# Altium PCB imx6_base_board_lcd7_r1.PcbDoc (part 1 of 6)
Units mil, origin at the board's own origin, x right, y up, seen from the top; angles counter-clockwise.
Board outline 7480.32 x 5118.11 mil, 4 copper layers (Top Layer, Internal Plane 1, Internal Plane 2, Bottom Layer), stack 30.635 mil thick; 518 components, 398 nets, 1886 pads, 1407 vias.
Unrouted connection lines stored in the file: 12.
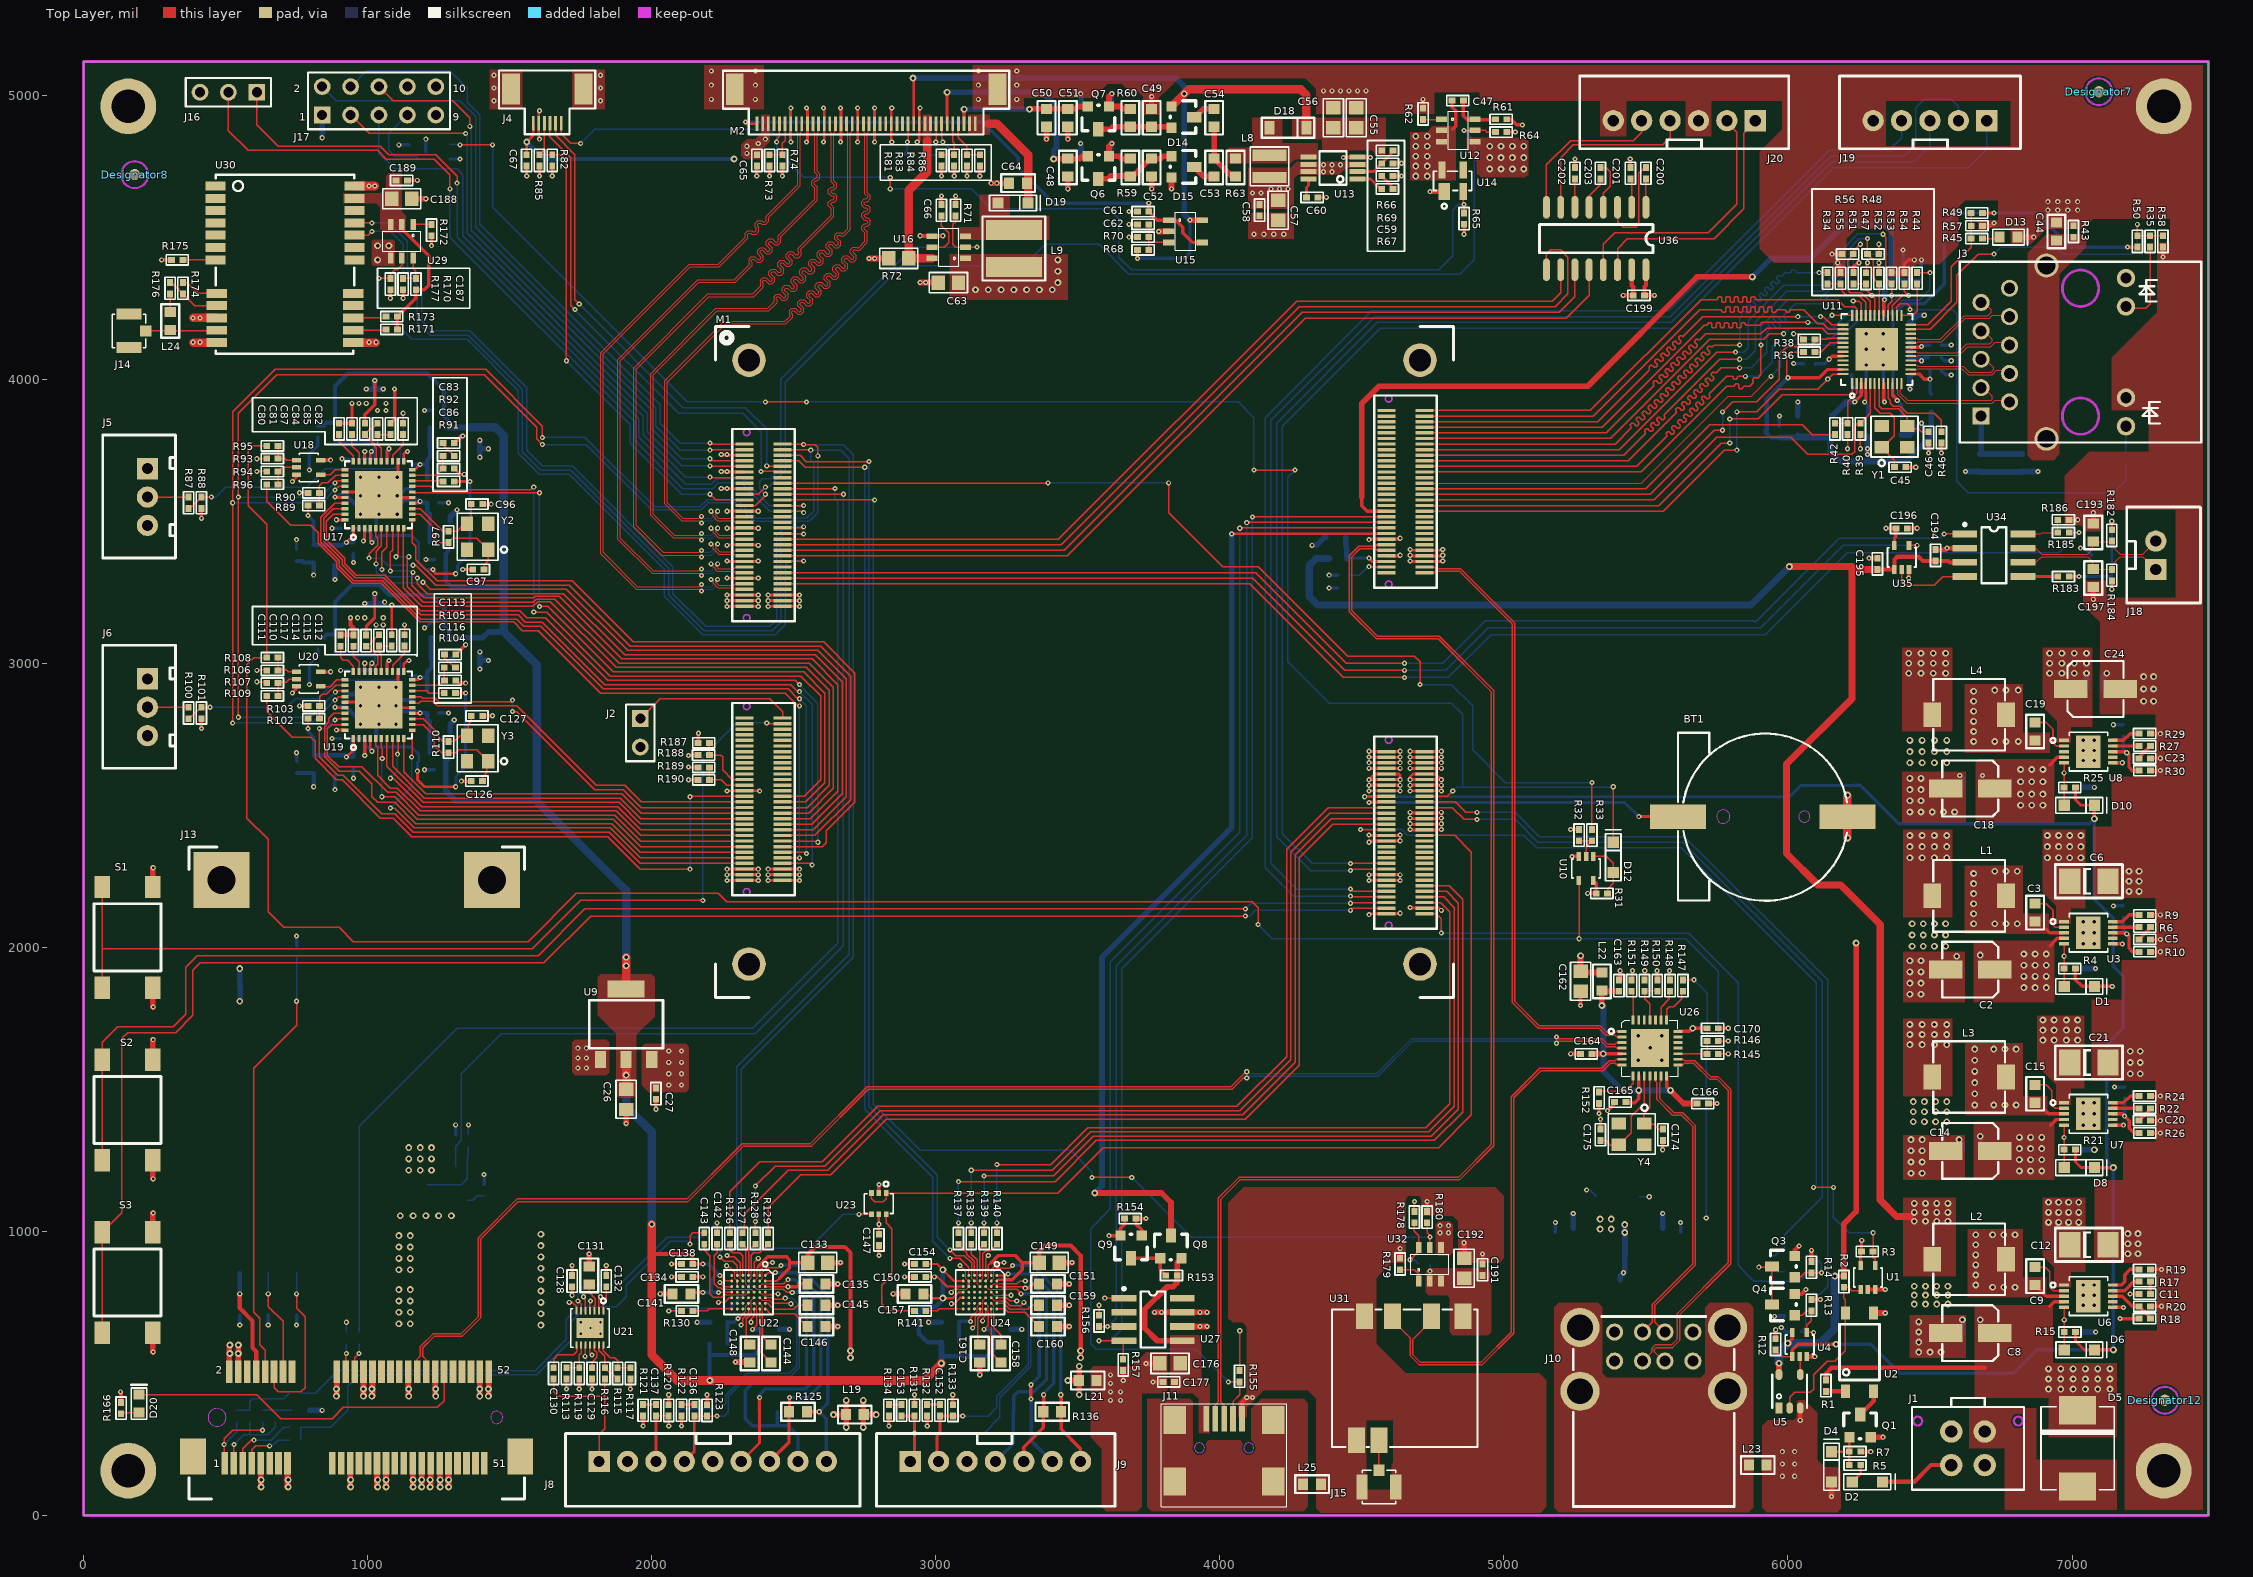
[diagram p0: Top Layer view]
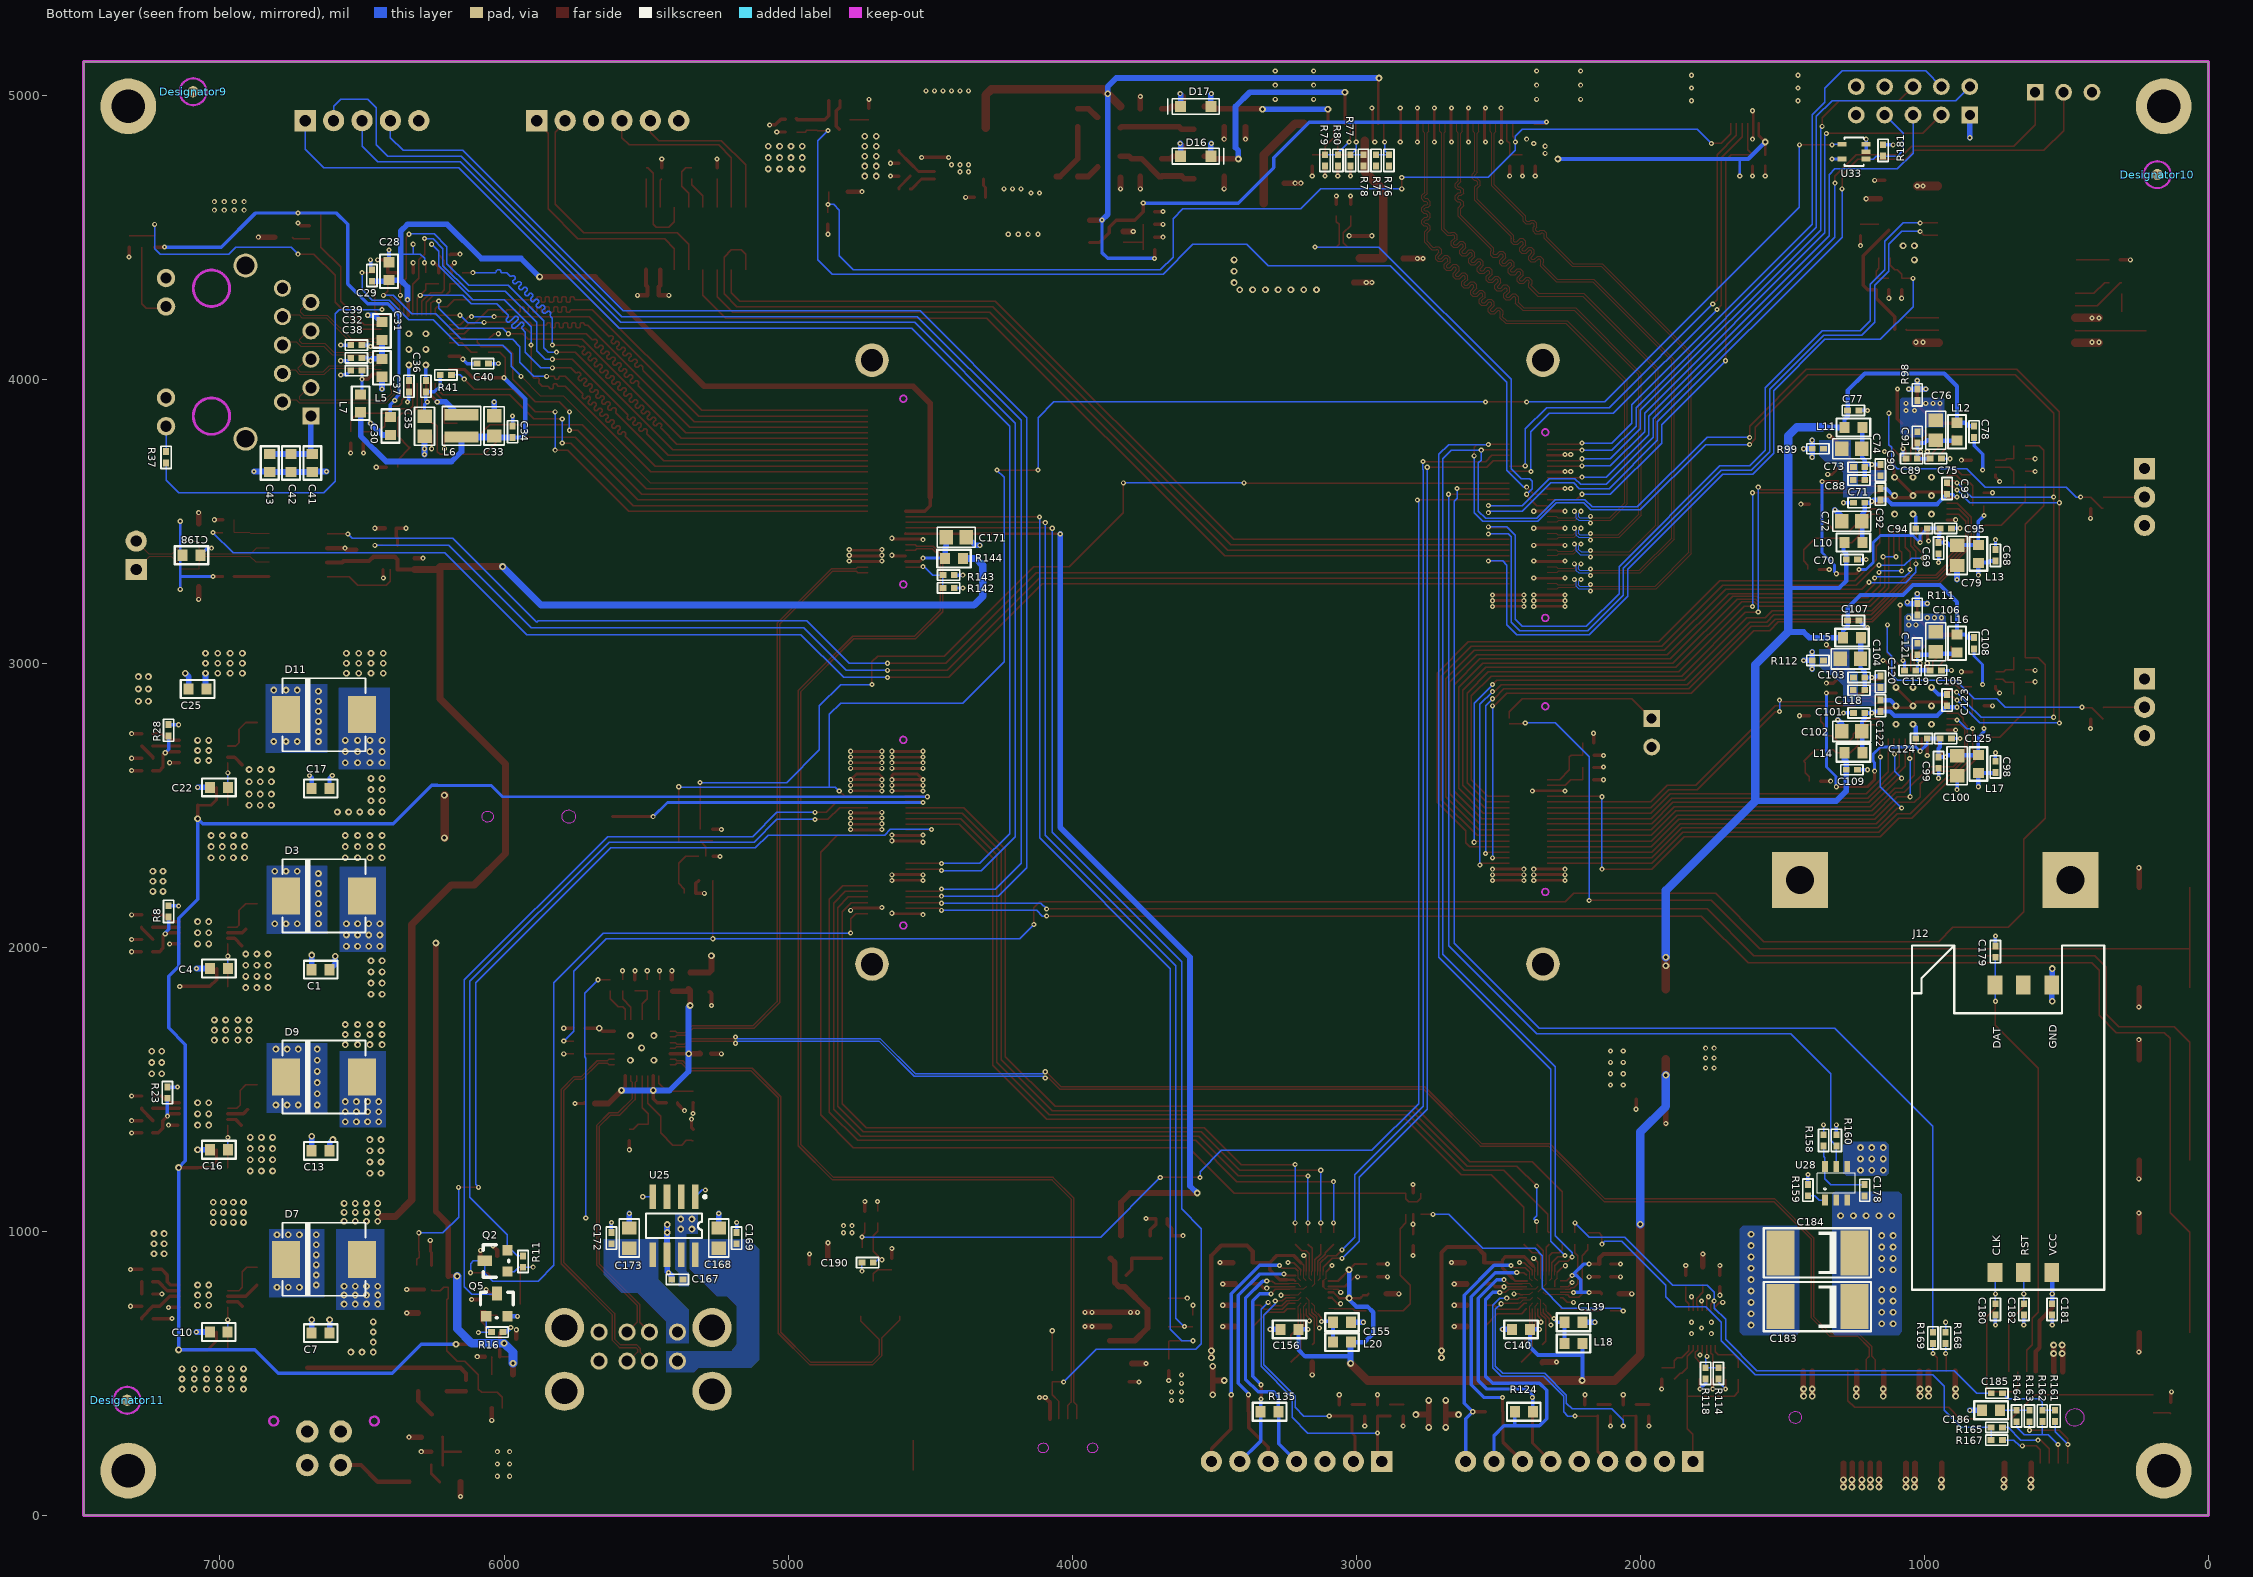
[diagram p1: Bottom Layer view, seen from below]
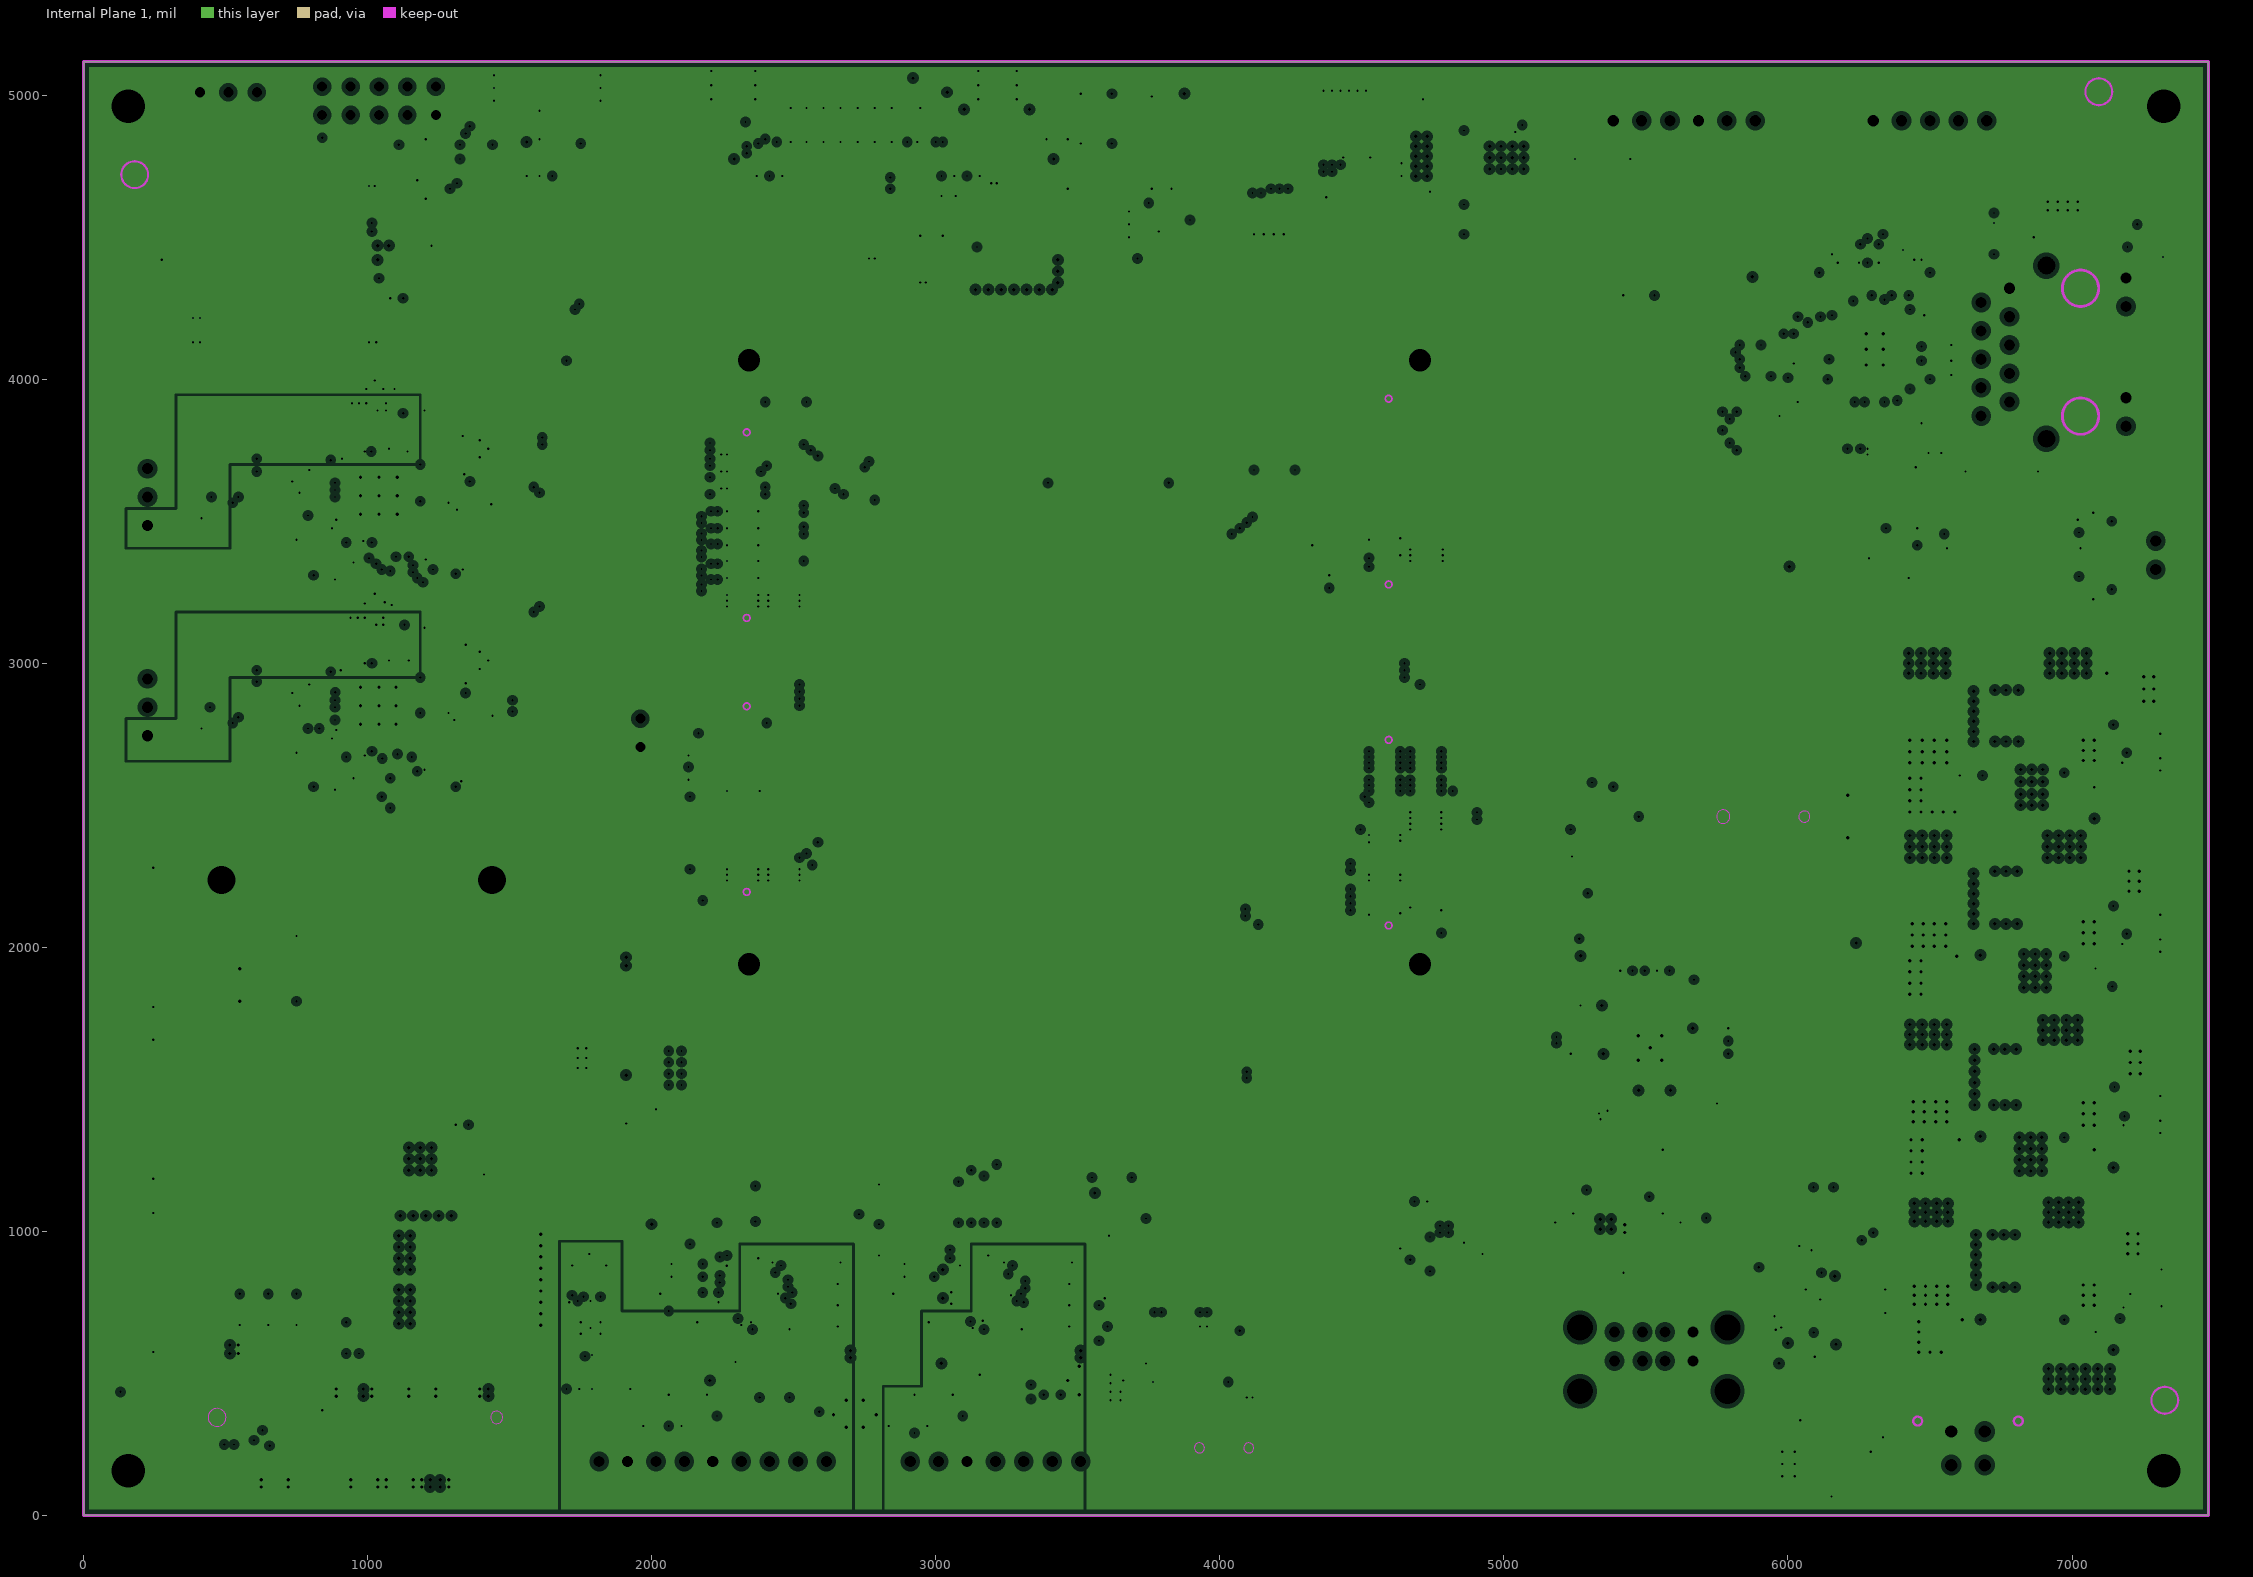
[diagram p2: Internal Plane 1, clearances drawn from the general rule]
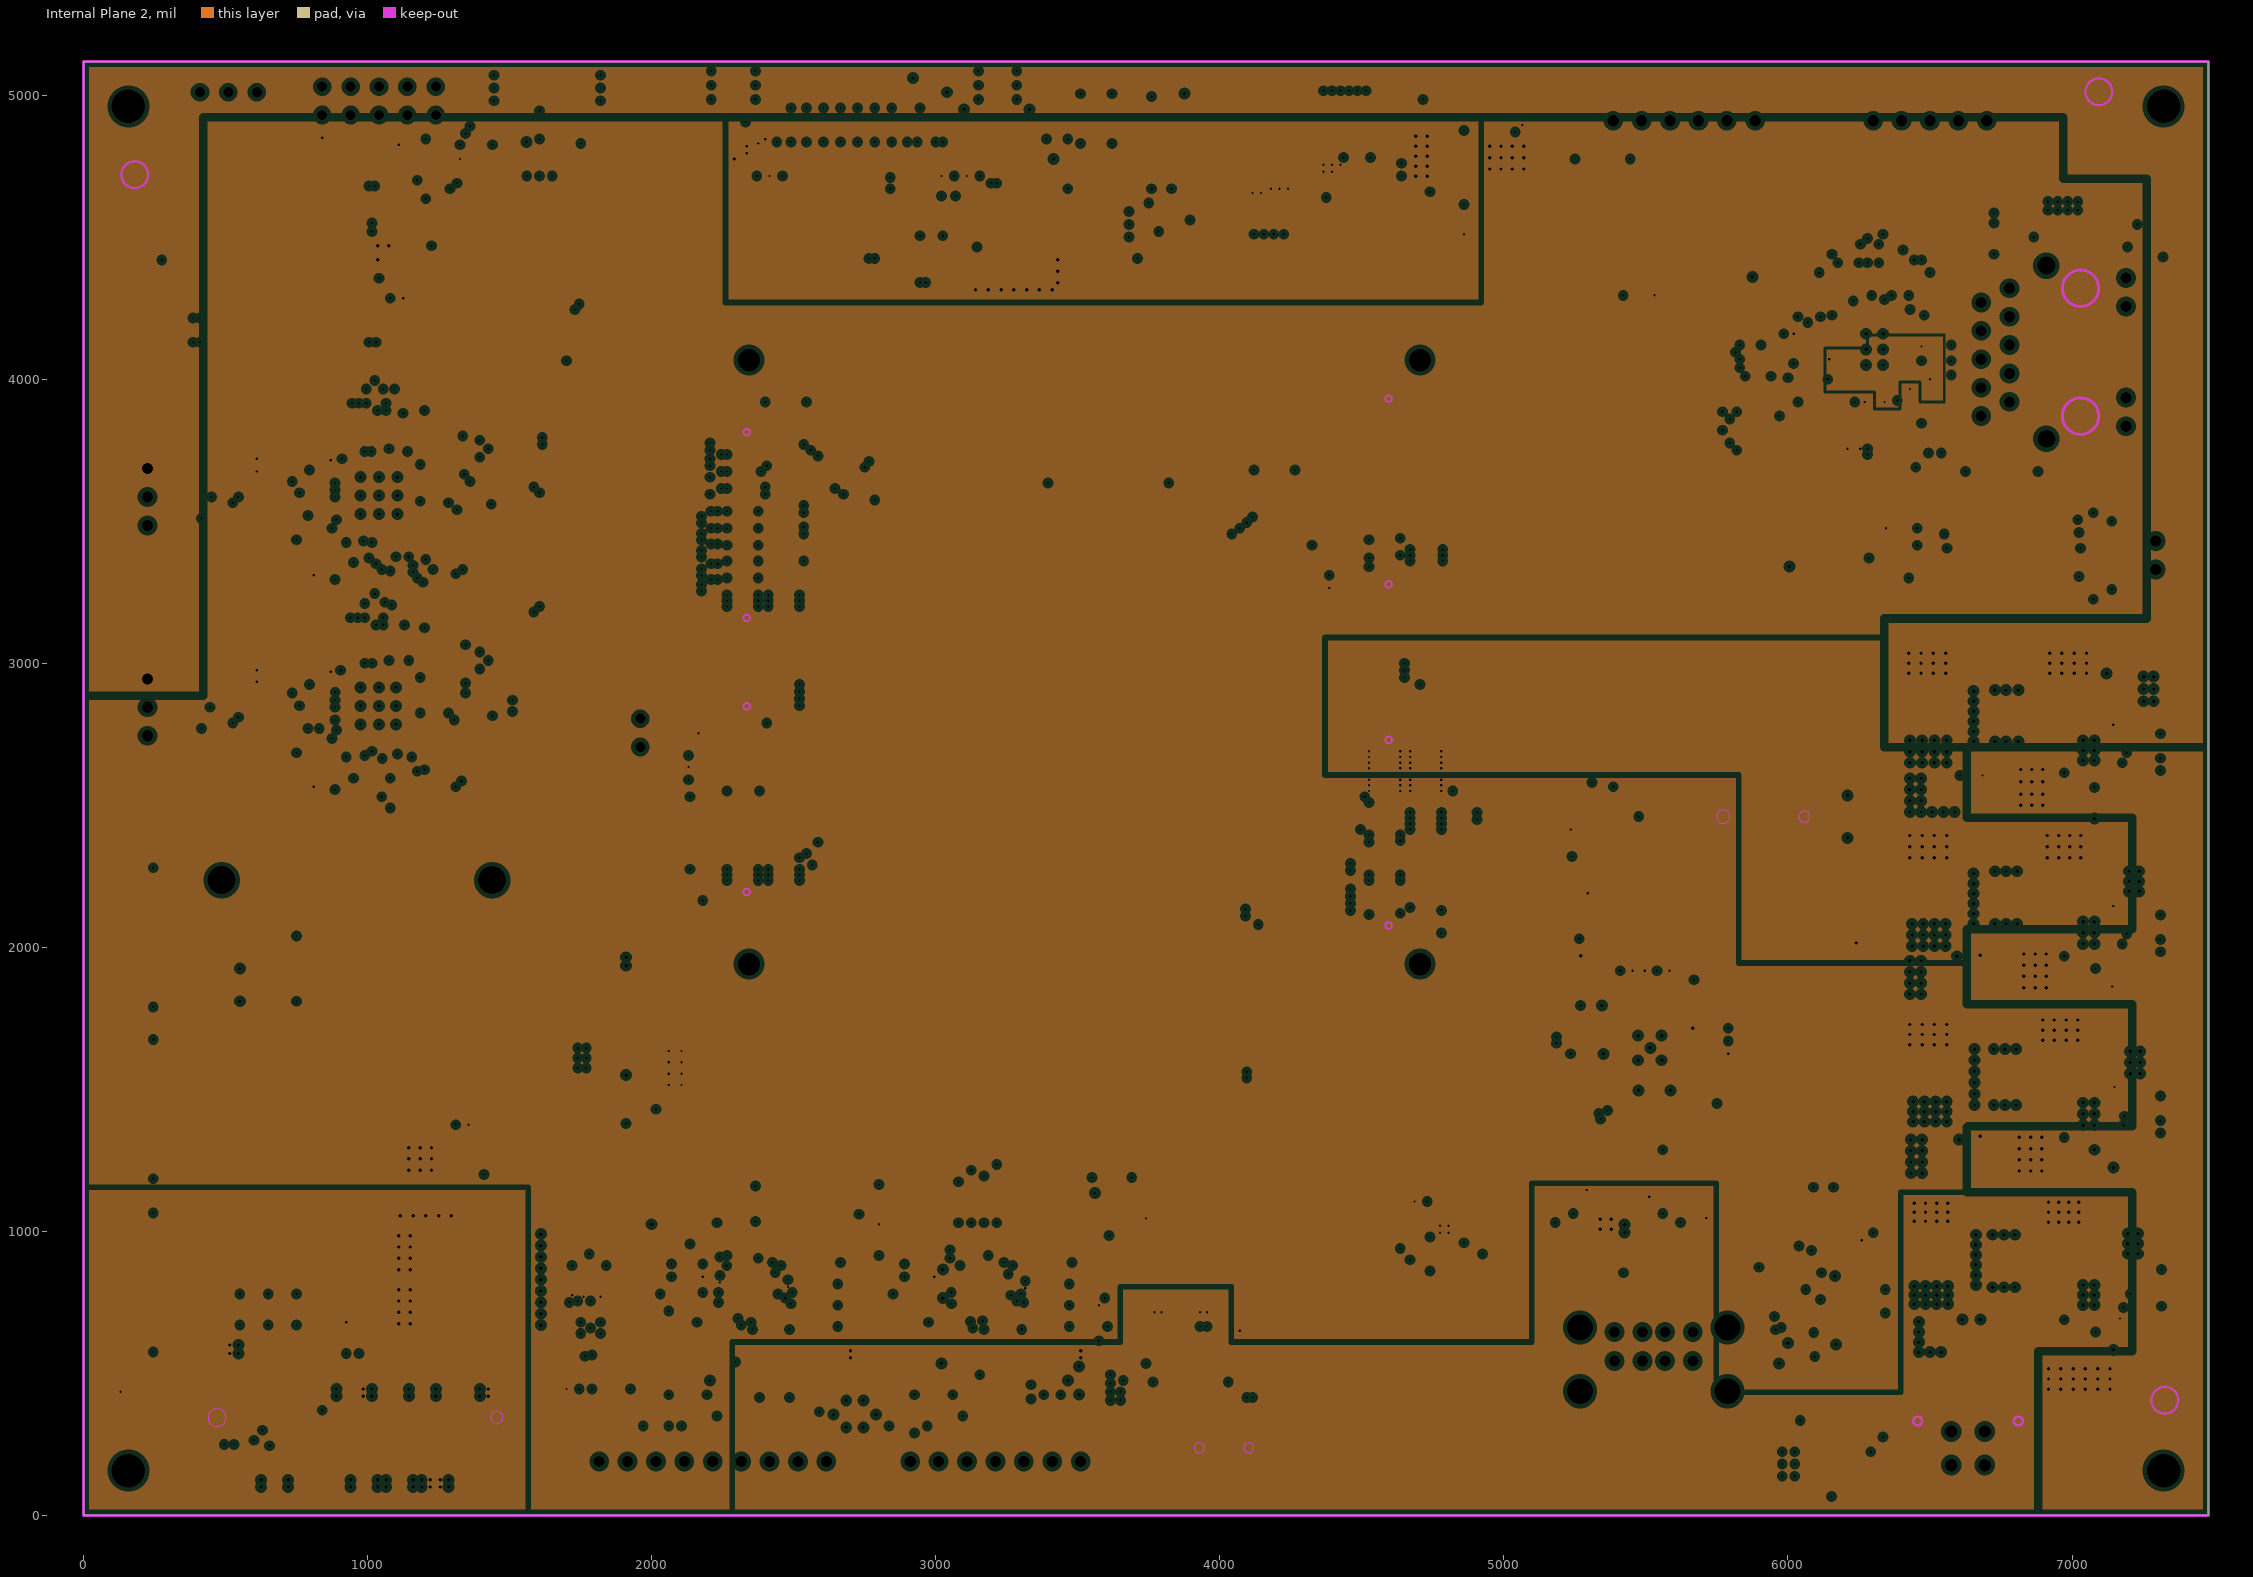
[diagram p3: Internal Plane 2, clearances drawn from the general rule]

## Layer stack, top to bottom
Top Solder: solder mask 0.4, Solder Resist, Dk 3.5
Top Layer: signal copper 1.4
Dielectric 1: core 10, FR-4, Dk 4.2
Internal Plane 1: plane copper 1.4173
Dielectric 3: prepreg 5, Dk 4.2
Internal Plane 2: plane copper 1.4173
Dielectric 2: core 10, Dk 4.2
Bottom Layer: signal copper 1.4
Bottom Solder: solder mask 0.4, Solder Resist, Dk 3.5

## Board outline
0,0 7480.32,0 7480.32,5118.11 0,5118.11

## Design rules (kind name [scope] priority, off if disabled: settings)
Clearance Clearance_2 [(InComponent('U22') OR InComponent('U24'))] p1: gap=3
Clearance Clearance_1 [InNetClass('USB_DIFF')] p2: gap=3.7
Clearance [All] p3: gap=5
ComponentClearance [All] p1: gap=0 collisioncheckmode=3 verticalgap=0 showdistances=FALSE
DiffPairsRouting DiffPairsRouting_1 [InDifferentialPairClass('other_diff')] p1: maxlimit=5.2 minlimit=5.2 mostfreqgap=5.2 toplayer_minwidth=3.8 toplayer_maxwidth=3.8 toplayer_prefwidth=3.8 bottomlayer_minwidth=3.8 bottomlayer_maxwidth=3.8 bottomlayer_prefwidth=3.8 maxuncoupledlength=500
DiffPairsRouting [InDifferentialPairClass('usb_diff')] p2: maxlimit=3.7 minlimit=3.7 mostfreqgap=3.7 toplayer_minwidth=5.3 toplayer_maxwidth=5.3 toplayer_prefwidth=5.3 bottomlayer_minwidth=5.3 bottomlayer_maxwidth=5.3 bottomlayer_prefwidth=5.3 maxuncoupledlength=500
PlaneClearance PlaneClearance_3 [InNet('VBAT')] p1 off: clearance=20
PlaneClearance PlaneClearance_2 [InComponent('J1') OR InComponent('J5') OR InComponent('J6')] p2 off: clearance=20
PlaneClearance PlaneClearance_1 [InPadClass('MT')] p3: clearance=59.06
PlaneClearance [All] p4: clearance=15
PlaneConnect PlaneConnect_3 [IsVia] p1: planeconnectstyle=Direct reliefexpansion=20 reliefentries=4 reliefconductorwidth=10 reliefairgap=10
PlaneConnect PlaneConnect_2 [InComponent('J1')] p2: planeconnectstyle=Relief reliefexpansion=20 reliefentries=4 reliefconductorwidth=31.5 reliefairgap=20
PlaneConnect PlaneConnect_1 [InPadClass('MT')] p3: planeconnectstyle=Direct reliefexpansion=20 reliefentries=4 reliefconductorwidth=10 reliefairgap=10
PlaneConnect [All] p4: planeconnectstyle=Relief reliefexpansion=20 reliefentries=4 reliefconductorwidth=20 reliefairgap=10
PolygonConnect [All] p1: connectstyle=Direct reliefconductorwidth=10 reliefentries=4 polygonreliefangle="90 Angle" airgapwidth=10
RoutingVias [All] p1: holewidth=8 width=18 viastyle="Through Hole" minholewidth=8 minwidth=18 maxholewidth=20 maxwidth=40
SilkToSilkClearance [All] p1: silktosilkclearance=0
SilkToSolderMaskClearance [IsPad] p1: minsilkscreentomaskgap=0 clearancetoexposedcopper=TRUE
SolderMaskExpansion [All] p1: expansion=4
Width [All] p1: maxlimit=200 minlimit=3 preferedwidth=4.7
24 further rules are at their usual default settings.

## Classes and differential pairs
differential pair class other_diff: CAN LVDS0-CLK LVDS0-TX0 LVDS0-TX1 LVDS0-TX2 LVDS0-TX3 RGMII-TRX0 RGMII-TRX1 RGMII-TRX2 RGMII-TRX3
differential pair class usb_diff: OTG USB1 USB2 USB3 USB4 USB-HOST
component class audio_inner: C133 C134 C135 C138 C139 C140 C141 C142 C143 C144 C145 C146 C148 L18 R126 R127 R128 R129 R130 U22
component class 13-UART_CAN_IO: C193 C194 C195 C196 C197 C198 C199 C200 C201 C202 C203 J18 J19 J20 R182 R183 R184 R185 R186 U34 U35 U36
component class 12-DEBUG_JTAG: J16 J17 R181 U33
component class 11-GPS_WIFI: C187 C188 C189 C190 C191 C192 J14 J15 L24 R170 R171 R172 R173 R174 R175 R176 R177 R178 R179 R180 U29 U30 U31 U32
component class 10-CELLULAR_COMM: C178 C179 C180 C181 C182 C183 C184 C185 C186 D20 J12 J13 R158 R159 R160 R161 R162 R163 R164 R165 R166 R167 R168 R169 U28
component class 09-USB: C162 C163 C164 C165 C166 C167 C168 C169 C170 C171 C172 C173 C174 C175 C176 C177 J10 J11 L22 L23 L25 Q8 Q9 R142 R143 R144 R145 R146 R147 R148 R149 R150 R151 R152 R153 R154 R155 R156 R157 U25 U26 U27 Y4
component class 08-AUDIO_OUTER: C149 C150 C151 C152 C153 C154 C155 C156 C157 C158 C159 C160 C161 J9 L20 L21 R131 R132 R133 R134 R135 R136 R137 R138 R139 R140 R141 U24
component class 07-AUDIO_INNER: C128 C129 C130 C131 C132 C133 C134 C135 C136 C137 C138 C139 C140 C141 C142 C143 C144 C145 C146 C147 C148 J8 L18 L19 R113 R114 R115 R116 R117 R118 R119 R120 R121 R122 R123 R124 R125 R126 R127 R128 R129 R130 U21 U22 U23
component class 06-VIDEO_IN_ADC_2: C98 C99 C100 C101 C102 C103 C104 C105 C106 C107 C108 C109 C110 C111 C112 C113 C114 C115 C116 C117 C118 C119 C120 C121 C122 C123 C124 C125 C126 C127 J6 L14 L15 L16 L17 R100 R101 R102 R103 R104 R105 R106 R107 R108 R109 R110 R111 R112 U19 Y3
component class 05-VIDEO_IN_ADC_1: C68 C69 C70 C71 C72 C73 C74 C75 C76 C77 C78 C79 C80 C81 C82 C83 C84 C85 C86 C87 C88 C89 C90 C91 C92 C93 C94 C95 C96 C97 J5 L10 L11 L12 L13 R87 R88 R89 R90 R91 R92 R93 R94 R95 R96 R97 R98 R99 U17 U18 Y2
component class 04-LCD: C47 C48 C49 C50 C51 C52 C53 C54 C55 C56 C57 C58 C59 C60 C61 C62 C63 C64 C65 C66 C67 D14 D15 D16 D17 D18 D19 J4 L8 L9 Q6 Q7 R59 R60 R61 R62 R63 R64 R65 R66 R67 R68 R69 R70 R71 R72 R73 R74 R75 R76 R77 R78 R79 R80 R81 R82 R83 R84 R85 R86 U12 U13 U14 U15 U16
component class 03-ETHERNET: C28 C29 C30 C31 C32 C33 C34 C35 C36 C37 C38 C39 C40 C41 C42 C43 C44 C45 C46 D13 J3 L5 L6 L7 R34 R35 R36 R37 R38 R39 R40 R41 R42 R43 R44 R45 R46 R47 R48 R49 R50 R51 R52 R53 R54 R55 R56 R57 R58 U11 Y1
component class 02-CPU_BOARD: BT1 D12 J2 M1 R31 R32 R33 R187 R188 R189 R190 S1 S2 S3 U10
component class 01-POWER: C1 C2 C3 C4 C5 C6 C7 C8 C9 C10 C11 C12 C13 C14 C15 C16 C17 C18 C19 C20 C21 C22 C23 C24 C25 C26 C27 D1 D2 D3 D4 D5 D6 D7 D8 D9 D10 D11 J1 L1 L2 L3 L4 Q1 Q2 Q3 Q4 Q5 R1 R2 R3 R4 R5 R6 R7 R8 R9 R10 R11 R12 R13 R14 R15 R16 R17 R18 R19 R20 R21 R22 R23 R24 R25 R26 R27 R28 R29 R30 U1 U2 U3 U4 U5 U6 U7 U8 U9
pad class MT: Free-MT1 Free-MT2 Free-MT3 Free-MT4 J13-MT9 J13-MT10 M1-MT5 M1-MT6 M1-MT7 M1-MT8
net class USB_DIFF: OTG_N OTG_P USB1_N USB1_P USB2_N USB2_P USB3_N USB3_P USB4_N USB4_P USB-HOST_N USB-HOST_P
net class RGMII_RX: RGMII-RXCLK RGMII-RXD0 RGMII-RXD1 RGMII-RXD2 RGMII-RXD3 RGMII-RXDV
net class RGMII_TX: RGMII-TXCLK RGMII-TXD0 RGMII-TXD1 RGMII-TXD2 RGMII-TXD3 RGMII-TXEN
differential pair class lvds: LVDS0-CLK LVDS0-TX0 LVDS0-TX1 LVDS0-TX2 LVDS0-TX3
differential pair USB-HOST: +USB-HOST_P -USB-HOST_N
differential pair USB4: +USB4_P -USB4_N
differential pair USB3: +USB3_P -USB3_N
differential pair USB2: +USB2_P -USB2_N
differential pair USB1: +USB1_P -USB1_N
differential pair RGMII-TRX3: +RGMII-TRX3_P -RGMII-TRX3_N
differential pair RGMII-TRX2: +RGMII-TRX2_P -RGMII-TRX2_N
differential pair RGMII-TRX1: +RGMII-TRX1_P -RGMII-TRX1_N
differential pair RGMII-TRX0: +RGMII-TRX0_P -RGMII-TRX0_N
differential pair OTG: +OTG_P -OTG_N
differential pair LVDS0-TX3: +LVDS0-TX3_P -LVDS0-TX3_N
differential pair LVDS0-TX2: +LVDS0-TX2_P -LVDS0-TX2_N
differential pair LVDS0-TX1: +LVDS0-TX1_P -LVDS0-TX1_N
differential pair LVDS0-TX0: +LVDS0-TX0_P -LVDS0-TX0_N
differential pair LVDS0-CLK: +LVDS0-CLK_P -LVDS0-CLK_N
differential pair CAN: +CAN_P -CAN_N

## Components (designator, comment, footprint, x,y, rotation, side; value= is the part's Value field where it differs from the comment)
BT1 "CR1220" cr1220 5920,2460 r180 top
C1 "0.1uF/50V" 0603 6645.67,1921.26 r90 bottom (schematic designator C13)
C2 "4.7uF/50V" DL-5X5.4 6641.73,1921.26 r270 top (schematic designator C14)
C3 "0.47uF/50V" 0603 6870.08,2122.05 r180 top (schematic designator C15)
C4 "0.22uF/50V" 0603 7003.94,1925.2 r270 bottom (schematic designator C16)
C5 "680pF/50V" 0402 7256.1,2027.56 r180 top (schematic designator C20)
C6 "22uF/16V" 3528 7059.06,2232.28 r180 top (schematic designator C21)
C7 "0.1uF/50V" 0603 6645.67,641.73 r90 bottom (schematic designator C13)
C8 "4.7uF/50V" DL-5X5.4 6641.73,641.73 r270 top (schematic designator C14)
C9 "0.47uF/50V" 0603 6870.08,842.52 r180 top (schematic designator C15)
C10 "0.22uF/50V" 0603 7004.38,645.67 r270 bottom (schematic designator C16)
C11 "680pF/50V" 0402 7255.91,779.53 r0 top (schematic designator C20)
C12 "22uF/16V" 3528 7059.06,952.76 r180 top (schematic designator C21)
C13 "0.1uF/50V" 0603 6645.67,1283.46 r90 bottom
C14 "4.7uF/50V" DL-5X5.4 6641.73,1283.46 r270 top
C15 "0.47uF/50V" 0603 6870.08,1484.25 r180 top
C16 "0.22uF/50V" 0603 7003.94,1287.4 r270 bottom
C17 "0.1uF/50V" 0603 6645.67,2559.06 r90 bottom (schematic designator C13)
C18 "4.7uF/50V" DL-5X5.4 6641.73,2559.06 r270 top (schematic designator C14)
C19 "0.47uF/50V" 0603 6870.08,2759.84 r180 top (schematic designator C15)
C20 "680pF/50V" 0402 7255.91,1389.76 r180 top
C21 "22uF/16V" 3528 7059.06,1594.49 r180 top
C22 "0.22uF/50V" 0603 7003.94,2562.99 r270 bottom (schematic designator C16)
C23 "680pF/50V" 0402 7255.91,2665.35 r180 top (schematic designator C20)
C24 "22uF/25V" DL-5X5.4 7082.68,2909.45 r90 top
C25 "0.1uF/50V" 0603 7078.74,2909.45 r270 bottom
C26 "10uF/6.3V" 0805 1910,1500 r270 top
C27 "0.1uF/10V" 0402 2015,1485 r90 top
C28 "1uF/6.3V" 0603 6405,4380 r0 bottom
C29 "0.1uF/10V" 0402 6465,4365 r270 bottom
C30 "1uF/6.3V" 0603 6400,3835 r180 bottom
C31 "1uF/6.3V" 0603 6430,4170 r0 bottom
C32 "0.1uF/10V" 0402 6520,4075 r180 bottom
C33 "10uF/6.3V" 0805 6035,3800 r90 bottom
C34 "0.1uF/10V" 0402 5970,3815 r270 bottom
C35 "10uF/6.3V" 0805 6280,3870 r270 bottom
C36 "0.1uF/10V" 0402 6275,3975 r270 bottom
C37 "0.1uF/10V" 0402 6335,3975 r270 bottom
C38 "0.1uF/10V" 0402 6520,4030 r180 bottom
C39 "0.1uF/10V" 0402 6520,4120 r180 bottom
C40 "0.1uF/10V" 0402 6075,4055 r0 bottom
C41 "0.1uF(DNP)" 0603 6675,3705 r180 bottom
C42 "0.1uF(DNP)" 0603 6750,3705 r180 bottom
C43 "0.1uF(DNP)" 0603 6825,3705 r180 bottom
C44 "0.1uF/50V" 0603 6945,4520 r0 top
C45 "22pF/50V" 0402 6395,3690 r180 top
C46 "22pF/50V" 0402 6495,3795 r90 top
C47 "0.01uF/10V" 0402 4837.6,4980.71 r180 top
C48 "1µF/50V" 0603 3465,4745 r180 top
C49 "1µF/50V" 0603 3760,4920 r180 top
C50 "1µF/50V" 0603 3390,4920 r0 top
C51 "1µF/50V" 0603 3465,4920 r0 top
C52 "1µF/50V" 0603 3760,4745 r0 top
C53 "1µF/50V" 0603 3980,4745 r0 top
C54 "1µF/50V" 0603 3980,4920 r0 top
C55 "10uF/16V" 0805 4480,4885 r90 top
C56 "10uF/16V" 0805 4400,4885 r90 top
C57 "10µF/6.3V" 0805 4205,4630 r270 top
C58 "1µF/10V" 0402 4140,4595 r90 top
C59 "3300pF/50V" 0402 4590,4715 r180 top
C60 "0.1uF/10V" 0402 4325,4640 r180 top
C61 "1µF/10V" 0402 3730,4590 r0 top
C62 "0.1uF/10V" 0402 3730,4545 r0 top
C63 "10µF/6.3V" 0805 3080,4340 r180 top
C64 "1µF/50V" 0603 3290,4690 r270 top
C65 "0.1uF/10V" 0402 2370,4770 r90 top
C66 "0.22uF/10V" 0402 3020,4595 r270 top
C67 "0.1uF/10V" 0402 1560,4770 r90 top
C68 "0.1uF/10V" 0402 750,3380 r270 bottom
C69 "0.1uF/10V" 0402 950,3405 r90 bottom
C70 "0.1uF/10V" 0402 1255,3365 r0 bottom
C71 "0.1uF/10V" 0402 1230,3565 r180 bottom
C72 "10uF/6.3V" 0805 1220,3500 r0 bottom
C73 "0.1uF/10V" 0402 1230,3690 r180 bottom
C74 "10uF/6.3V" 0805 1220,3755 r0 bottom
C75 "0.1uF/10V" 0402 960,3720 r0 bottom
C76 "10uF/6.3V" 0805 960,3785 r90 bottom
C77 "0.1uF/10V" 0402 1250,3890 r0 bottom
C78 "0.1uF/10V" 0402 825,3815 r90 bottom
C79 "10uF/6.3V" 0805 885,3415 r270 bottom
C80 "0.1uF/10V" 0402 900,3825 r270 top
C81 "0.1uF/10V" 0402 945,3825 r270 top
C82 "0.1uF/10V" 0402 1125,3825 r90 top
C83 "0.082uF/10V" 0402 1285,3775 r0 top
C84 "0.1uF/10V" 0402 1035,3825 r90 top
C85 "0.1uF/10V" 0402 1080,3825 r90 top
C86 "0.01uF/10V" 0402 1285,3685 r0 top
C87 "0.1uF/10V" 0402 990,3825 r270 top
C88 "0.01uF/10V" 0402 1230,3645 r0 bottom
C89 "0.01uF/10V" 0402 1045,3720 r0 bottom
C90 "0.1uF/10V" 0402 1155,3680 r270 bottom
C91 "0.1uF/10V" 0402 1025,3795 r90 bottom
C92 "0.1uF/10V" 0402 1155,3595 r90 bottom
C93 "0.01uF/10V" 0402 920,3615 r90 bottom
C94 "0.01uF/10V" 0402 1010,3475 r0 bottom
C95 "0.1uF/10V" 0402 925,3475 r180 bottom
C96 "47pF/16V" 0402 1385,3560 r0 top
C97 "47pF/16V" 0402 1390,3330 r180 top
C98 "0.1uF/10V" 0402 750,2635 r270 bottom
C99 "0.1uF/10V" 0402 950,2650 r90 bottom
C100 "10uF/6.3V" 0805 885,2675 r270 bottom
C101 "0.1uF/10V" 0402 1230,2825 r180 bottom
C102 "10uF/6.3V" 0805 1220,2760 r0 bottom
C103 "0.1uF/10V" 0402 1230,2950 r180 bottom
C104 "10uF/6.3V" 0805 1225,3015 r0 bottom
C105 "0.1uF/10V" 0402 960,2975 r0 bottom
C106 "10uF/6.3V" 0805 960,3040 r90 bottom
C107 "0.1uF/10V" 0402 1250,3150 r0 bottom
C108 "0.1uF/10V" 0402 825,3070 r90 bottom
C109 "0.1uF/10V" 0402 1255,2625 r0 bottom
C110 "0.1uF/10V" 0402 950,3080 r270 top
C111 "0.1uF/10V" 0402 905,3080 r270 top
C112 "0.1uF/10V" 0402 1130,3080 r90 top
C113 "0.082uF/10V" 0402 1290,3030 r0 top
C114 "0.1uF/10V" 0402 1040,3080 r90 top
C115 "0.1uF/10V" 0402 1085,3080 r90 top
C116 "0.01uF/10V" 0402 1290,2940 r0 top
C117 "0.1uF/10V" 0402 995,3080 r270 top
C118 "0.01uF/10V" 0402 1230,2905 r0 bottom
C119 "0.01uF/10V" 0402 1050,2975 r0 bottom
C120 "0.1uF/10V" 0402 1155,2935 r270 bottom
C121 "0.1uF/10V" 0402 1025,3050 r90 bottom
C122 "0.1uF/10V" 0402 1155,2850 r90 bottom
C123 "0.01uF/10V" 0402 920,2870 r90 bottom
C124 "0.01uF/10V" 0402 1010,2735 r0 bottom
C125 "0.1uF/10V" 0402 925,2735 r180 bottom
C126 "18pF/16V" 0402 1385,2585 r180 top
C127 "18pF/16V" 0402 1385,2815 r0 top
C128 "1uF/6.3V" 0402 1720,825 r90 top
C129 "0.47uF/6.3V" 0402 1790,500 r90 top
C130 "0.1uF/10V" 0402 1655,500 r90 top
C131 "2.2uF/6.3V" 0603 1780,845 r180 top
C132 "0.1uF/10V" 0402 1840,825 r270 top
C133 "4.7uF/10V" 0805 2620,890 r180 top
C134 "0.1uF/10V" 0402 2125,840 r180 top
C135 "4.7uF/6.3V" 0603 2580,815 r270 top
C136 "0.1uF/10V" 0402 2150,370 r90 top
C137 "0.1uF/10V" 0402 2015,370 r90 top
C138 "0.1uF/10V" 0402 2125,885 r180 top
C139 "4.7uF/6.3V" 0603 2235,680 r270 bottom
C140 "2.2uF/6.3V" 0603 2420,655 r90 bottom
C141 "4.7uF/6.3V" 0603 2105,780 r90 top
C142 "0.1uF/10V" 0402 2230,975 r270 top
C143 "1uF/6.3V" 0402 2185,975 r270 top
C144 "2.2uF/16V" 0603 2420,570 r180 top
C145 "2.2uF/16V" 0603 2580,740 r270 top
C146 "2.2uF/16V" 0603 2580,665 r270 top
C147 "0.1uF/10V" 0402 2800,970 r90 top
C148 "4.7uF/6.3V" 0603 2345,570 r180 top
C149 "4.7uF/10V" 0805 3435,890 r180 top (schematic designator C133)
C150 "0.1uF/10V" 0402 2945,840 r180 top (schematic designator C134)
C151 "4.7uF/6.3V" 0603 3395,815 r270 top (schematic designator C135)
C152 "0.1uF/10V" 0402 3015,370 r90 top
C153 "0.1uF/10V" 0402 2880,370 r90 top
C154 "0.1uF/10V" 0402 2945,885 r180 top (schematic designator C138)
C155 "4.7uF/6.3V" 0603 3050,680 r270 bottom (schematic designator C139)
C156 "2.2uF/6.3V" 0603 3235,655 r90 bottom (schematic designator C140)
C157 "4.7uF/6.3V" 0603 2925,780 r90 top (schematic designator C141)
C158 "2.2uF/16V" 0603 3230,570 r180 top (schematic designator C144)
C159 "2.2uF/16V" 0603 3395,740 r270 top (schematic designator C145)
C160 "2.2uF/16V" 0603 3395,665 r270 top (schematic designator C146)
C161 "4.7uF/6.3V" 0603 3155,570 r180 top (schematic designator C148)
C162 "10uF/6.3V" 0805 5270,1845 r90 top
C163 "0.1uF/10V" 0402 5405,1865 r90 top
C164 "0.1uF/10V" 0402 5290,1625 r180 top
C165 "0.1uF/10V" 0402 5410,1455 r180 top
C166 "0.1uF/10V" 0402 5700,1450 r0 top
C167 "0.1uF/10V" 0402 5389.76,830.71 r180 bottom
C168 "4.7uF/10V" 0805 5244.09,940.94 r90 bottom
C169 "0.1uF/10V" 0402 5181.1,976.38 r270 bottom
C170 "0.1uF/10V" 0402 5735,1715 r180 top
C171 "4.7uF/10V" 0805 4443.39,3443.19 r180 bottom
C172 "0.1uF/10V" 0402 5622.05,976.38 r270 bottom
C173 "4.7uF/10V" 0805 5559.06,940.94 r90 bottom
C174 "20pF/16V" 0402 5560,1340 r270 top
C175 "20pF/16V" 0402 5340,1340 r90 top
C176 "4.7uF/10V" 0805 3860,535 r180 top
C177 "0.1uF/10V" 0402 3820,470 r0 top
C178 "0.01uF/10V" 0402 1210,1145 r270 bottom
C179 "33pF/16V" 0402 750,1985 r270 bottom
C180 "33pF/16V" 0402 750,725 r90 bottom
C181 "0.1uF/10V" 0402 550,725 r90 bottom
C182 "33pF/16V" 0402 650,725 r90 bottom
C183 "470uF/6.3V" 7343 1376.59,735.13 r270 bottom
C184 "470uF/6.3V" 7343 1376.57,924.13 r270 bottom
C185 "0.1uF/10V" 0402 745,430.13 r180 bottom
C186 "4.7uF/6.3V" 0603 765,370.13 r270 bottom
C187 "0.01uF/10V" 0402 1170,4335 r270 top
C188 "22uF/6.3V" 0805 1085,4635 r0 top
C189 "0.1uF/10V" 0402 1120,4700 r180 top
C190 "0.01uF/10V" 0402 4720,890 r0 bottom
C191 "0.1uF/10V" 0402 4925,865 r270 top
C192 "22uF/6.3V" 0805 4860,835 r90 top
C193 "56pF/50V" 0603 7075,3460 r0 top
C194 "0.1uF/10V" 0402 6520,3380 r270 top
C195 "0.22uF/10V" 0402 6315,3350 r270 top
C196 "0.22uF/10V" 0402 6400,3475 r180 top
C197 "56pF/50V" 0603 7075,3300 r0 top
C198 "1000pF(DNP)" 0603 7100,3380 r90 bottom
C199 "0.1uF/10V" 0402 5475,4295 r0 top
C200 "0.1uF/10V" 0402 5500,4725 r270 top
C201 "0.1uF/10V" 0402 5445,4725 r270 top
C202 "0.1uF/10V" 0402 5250,4725 r270 top
C203 "0.1uF/10V" 0402 5340,4725 r90 top
D1 "1N5819HW" 1N5819 7078.74,1862.2 r180 top (schematic designator D8)
D2 "MM3Z6V2ST1G" SOD323F 6279.53,118.11 r180 top
D3 "MBRS340T3G" SMC 6500,2181.1 r180 bottom
D4 "1N5819HW" 1N5819 6153.54,224.41 r270 top
D5 "MBRS340T3G" SMC 7019.68,102.36 r270 top
D6 "1N5819HW" 1N5819 7079.18,582.68 r180 top (schematic designator D8)
D7 "MBRS340T3G" SMC 6500,901.57 r180 bottom (schematic designator D9)
D8 "1N5819HW" 1N5819 7078.74,1224.41 r180 top
D9 "MBRS340T3G" SMC 6500,1543.31 r180 bottom
D10 "1N5819HW" 1N5819 7078.74,2500 r180 top (schematic designator D8)
D11 "MBRS340T3G" SMC 6500,2818.9 r180 bottom (schematic designator D9)
D12 "1N5819HW" 1N5819 5385,2370 r270 top
D13 "LED GREEN" LED0603 6745,4500 r90 top
D14 "BAT54SLT1G" SOT-23 3830,4960 r270 top
D15 "BAT54SLT1G" SOT-23 3830,4785 r270 top
D16 "MM3Z7V5B" SOD323F 3565,4785 r0 bottom
D17 "MM3Z22VB" SOD323F 3565,4960 r180 bottom
D18 "MBR120LSFT1G" SOD123FL 4305,4885 r180 top
D19 "1N5819HW" 1N5819 3325,4620 r180 top
D20 "LED GREEN" LED0603 195,362.01 r180 top
Designator7 "Comment" MARK 7094.49,5011.81 r0 top locked
Designator8 "Comment" MARK 180,4720 r0 top locked
Designator9 "Comment" MARK 7094.49,5011.81 r180 bottom locked
Designator10 "Comment" MARK 180,4720 r180 bottom locked
Designator11 "Comment" MARK 7326.77,405.51 r180 bottom locked
Designator12 "Comment" MARK 7326.77,405.51 r0 top locked
J1 "POWER IN" 3030WV-F-2*2P 6633.86,236.22 r0 top
J2 "BOOT MODE" HDR1X2 1960,2805 r270 top
J3 "SI-61001-F" SI-61001 7030,4095 r90 top
J4 "TOUCH PANEL" FPC0.5-DR-SMD-XP-F(6P) 1632.13,4960.91 r180 top
J5 "CAMERA1" CONN-3P 225,3685 r270 top
J6 "CAMERA2" CONN-3P 225,2945 r270 top
J8 "AUDIO INNER" CON-9PIN 2615,190 r0 top
J9 "AUDIO OUTER" CON-7PIN 2910,190 r0 top
J10 "USB HOST" USB-HOST-2 5665.35,543.31 r180 top
J11 "USB OTG" MINIUSB 4015,340 r180 top
J12 "SIMCARD" SIMLOCK 705,855 r90 bottom
J13 "SIM7100-PCIE" MINI-PCIE 470,345 r0 top locked
J14 "GPS ANT" ANT 160,4170 r90 top
J15 "WIFI ANT" ANT 4560,100 r180 top
J16 "DEBUG UART" HDR1X3 610,5010 r180 top
J17 "JTAG" HDR2X5 840,4930 r0 top
J18 "CAN" CON-2PIN 7295,3330 r270 top
J19 "I/O" CON-5PIN 6700,4910 r180 top
J20 "UART" CON-6PIN 5885,4910 r180 top
L1 "4.7uH/4A" IND-4.7UH-4A 6637.8,2181.1 r90 top (schematic designator L3)
L2 "4.7uH/4A" IND-4.7UH-4A 6637.8,901.57 r90 top (schematic designator L3)
L3 "4.7uH/4A" IND-4.7UH-4A 6637.8,1543.31 r90 top
L4 "4.7uH/4A" IND-4.7UH-4A 6637.8,2818.9 r90 top (schematic designator L3)
L5 "120ohm/100MHz 2A" 0603 6430,4040 r0 bottom
L6 "4.7uH/1A" IND-4.7UH-1A 6150,3875 r0 bottom
L7 "120ohm/100MHz 2A" 0603 6505,3915 r0 bottom
L8 "4.7uH/1A" IND-4.7UH-1A 4175,4710 r0 top
L9 "10uH/1.5A" IND-10UH 3275,4460 r90 top
L10 "120ohm/100MHz 2A" 0603 1250,3425 r90 bottom
L11 "120ohm/100MHz 2A" 0603 1250,3830 r90 bottom
L12 "120ohm/100MHz 2A" 0603 885,3815 r180 bottom
L13 "120ohm/100MHz 2A" 0603 810,3385 r0 bottom
L14 "120ohm/100MHz 2A" 0603 1250,2685 r90 bottom
L15 "120ohm/100MHz 2A" 0603 1255,3090 r90 bottom
L16 "120ohm/100MHz 2A" 0603 885,3070 r180 bottom
L17 "120ohm/100MHz 2A" 0603 810,2645 r0 bottom
L18 "120ohm/100MHz 2A" 0603 2235,605 r270 bottom
L19 "120ohm/100MHz 2A" 0603 2715,355 r270 top
L20 "120ohm/100MHz 2A" 0603 3050,610 r270 bottom (schematic designator L18)
L21 "120ohm/100MHz 2A" 0603 3535,475 r270 top
L22 "120ohm/100MHz 2A" 0603 5345,1880 r0 top
L23 "120ohm/100MHz 2A" 0603 5893.7,177.17 r270 top
L24 "27nH(DNP)" 0603 305,4205 r0 top
L25 "120ohm/100MHz 2A" 0603 4325,110 r270 top
M1 "IMX6Q-CPU-BOARD" IMX6-CPU-BOARD 2224.41,1822.83 r0 top locked
M2 "LVDS-LCD7" FPC0.5-DR-SMD-XP-F(40P) 2755,4960 r180 top
Q1 "S9014" NPN 6216.54,275.59 r0 top
Q2 "IRLML6402" MOSFET 5988.19,858.27 r90 bottom
Q3 "BSS138P" NPN 6023.62,838.58 r90 top
Q4 "BSS138P" NPN 6023.62,704.72 r90 top
Q5 "BSS138P" NPN 6062.99,700.79 r180 bottom
Q6 "BC857C-7-F" NPN 3610,4785 r180 top
Q7 "BC850CLT1G" NPN 3610,4960 r180 top
Q8 "IRLML6402" MOSFET 3790,905 r0 top
Q9 "BSS138P" NPN 3725,985 r180 top
R1 "4.7K" 0402 6133.86,456.69 r90 top
R2 "47K" 0402 6196.85,822.83 r90 top
R3 "10K" 0402 6279.53,929.13 r180 top
R4 "15K/1%" 0402 6992.13,1925.2 r180 top (schematic designator R21)
R5 "15K" 0402 6236.22,177.17 r180 top
R6 "15K/1%" 0402 7256.1,2070.87 r0 top (schematic designator R22)
R7 "47K" 0402 6236.22,224.41 r180 top
R8 "324K/1%" 0402 7181.1,2125.98 r90 bottom (schematic designator R23)
R9 "12.7K/1%" 0402 7256.1,2114.17 r180 top (schematic designator R24)
R10 "100K/1%" 0402 7256.09,1984.25 r0 top (schematic designator R26)
R11 "100K" 0402 5933.07,893.7 r90 bottom
R12 "10K" 0402 5956.69,602.36 r270 top
R13 "10K" 0402 6082.68,740.16 r270 top
R14 "10K" 0402 6082.68,874.02 r270 top
R15 "15K/1%" 0402 6992.57,645.67 r180 top (schematic designator R21)
R16 "10K" 0402 6023.62,645.67 r0 bottom
R17 "15K/1%" 0402 7255.91,822.83 r0 top (schematic designator R22)
R18 "536K/1%" 0402 7255.91,692.91 r180 top (schematic designator R23)
R19 "12.7K/1%" 0402 7255.91,866.14 r180 top (schematic designator R24)
R20 "100K/1%" 0402 7255.91,736.22 r0 top (schematic designator R26)
R21 "15K/1%" 0402 6992.13,1287.4 r180 top
R22 "15K/1%" 0402 7255.91,1433.07 r0 top
R23 "324K/1%" 0402 7185.04,1488.19 r90 bottom
R24 "12.7K/1%" 0402 7255.91,1476.38 r180 top
R25 "15K/1%" 0402 6992.13,2562.99 r180 top (schematic designator R21)
R26 "100K/1%" 0402 7255.91,1346.46 r0 top
R27 "15K/1%" 0402 7255.91,2708.66 r0 top (schematic designator R22)
R28 "715K/1%" 0402 7181.1,2763.78 r90 bottom (schematic designator R23)
R29 "12.7K/1%" 0402 7255.91,2751.97 r180 top (schematic designator R24)
R30 "49.9K/1%" 0402 7255.91,2622.05 r0 top (schematic designator R26)
R31 "10K" 0402 5345,2190 r180 top
R32 "4.7K" 0402 5265,2395 r90 top
R33 "0" 0402 5310,2395 r90 top
R34 "0" 0402 6140,4355 r90 top
R35 "270" 0402 7275,4485 r90 top
R36 "4.7K" 0402 6075,4095 r0 top
R37 "270" 0402 7190,3725 r270 bottom
R38 "10K" 0402 6075,4140 r0 top
R39 "10K" 0402 6255,3825 r90 top
R40 "10K(DNP)" 0402 6210,3825 r90 top
R41 "1.5K" 0402 6205,4015 r180 bottom
R42 "0" 0402 6165,3825 r270 top
R43 "100" 0402 7005,4520 r270 top
R44 "22" 0402 6455,4355 r90 top
R45 "270" 0402 6665,4495 r180 top
R46 "2.37K/1%" 0402 6540,3795 r270 top
R47 "10K" 0402 6275,4355 r270 top
R48 "10K(DNP)" 0402 6300,4440 r180 top
R49 "10K(DNP)" 0402 6665,4585 r180 top
R50 "10K(DNP)" 0402 7230,4485 r90 top
R51 "10K(DNP)" 0402 6230,4355 r90 top
R52 "10K" 0402 6320,4355 r90 top
R53 "10K" 0402 6365,4355 r90 top
R54 "10K" 0402 6410,4355 r90 top
R55 "10K" 0402 6185,4355 r90 top
R56 "10K" 0402 6210,4440 r180 top
R57 "10K" 0402 6665,4540 r0 top
R58 "10K" 0402 7320,4485 r270 top
R59 "1K" 0603 3685,4745 r180 top
R60 "820" 0603 3685,4920 r180 top
R61 "10K" 0402 4990,4915 r0 top
R62 "61.9K/1%" 0402 4715.55,4933.46 r90 top
R63 "10" 0603 4055,4745 r180 top
R64 "10K" 0402 4990,4870 r0 top
R65 "47K" 0402 4860,4565 r90 top
R66 "140K/1%" 0402 4590,4805 r180 top
R67 "39K" 0402 4590,4670 r180 top
R68 "12.7K/1%" 0402 3730,4455 r180 top
R69 "17.8K/1%" 0402 4590,4760 r180 top
R70 "6.8K/1%" 0402 3730,4500 r0 top
R71 "10K" 0402 3070,4595 r270 top
R72 "0.56/1%" 0805 2905,4425 r180 top
R73 "0" 0402 2415,4770 r270 top
R74 "0(DNP)" 0402 2460,4770 r270 top
R75 "0(DNP)" 0402 2930,4770 r270 bottom
R76 "0" 0402 2885,4770 r270 bottom
R77 "0" 0402 3020,4770 r270 bottom
R78 "0(DNP)" 0402 2975,4770 r270 bottom
R79 "0(DNP)" 0402 3110,4770 r270 bottom
R80 "0" 0402 3065,4770 r270 bottom
R81 "0(DNP)" 0402 3020,4770 r270 top
R82 "10K(DNP)" 0402 1650,4770 r90 top
R83 "0" 0402 3065,4770 r270 top
R84 "0(DNP)" 0402 3110,4770 r270 top
R85 "10K" 0402 1605,4770 r90 top
R86 "0" 0402 3155,4770 r270 top
R87 "39" 0402 370,3565 r270 top
R88 "39" 0402 415,3565 r270 top
R89 "0(DNP)" 0402 810,3555 r0 top
R90 "4.7K" 0402 810,3600 r0 top
R91 "4.7K" 0402 1285,3640 r180 top
R92 "1.69K" 0402 1285,3730 r180 top
R93 "10K" 0402 665,3720 r180 top
R94 "10K" 0402 665,3675 r180 top
R95 "0" 0402 665,3765 r180 top
R96 "0" 0402 665,3630 r180 top
R97 "1M" 0402 1285,3445 r270 top
R98 "0" 0402 1025,3945 r270 bottom
R99 "0" 0402 1375,3755 r180 bottom
R100 "39" 0402 370,2825 r270 top
R101 "39" 0402 415,2825 r270 top
R102 "4.7K" 0402 810,2805 r0 top
R103 "0(DNP)" 0402 810,2850 r0 top
R104 "4.7K" 0402 1290,2895 r180 top
R105 "1.69K" 0402 1290,2985 r180 top
R106 "10K" 0402 665,2975 r180 top
R107 "10K" 0402 665,2930 r180 top
R108 "0" 0402 665,3020 r180 top
R109 "0" 0402 665,2885 r180 top
R110 "1M" 0402 1285,2705 r270 top
R111 "0" 0402 1025,3190 r270 bottom
R112 "0" 0402 1375,3010 r180 bottom
R113 "0" 0402 1700,500 r270 top
R114 "0(DNP)" 0402 1725,500 r270 bottom
R115 "150K" 0402 1880,500 r90 top
R116 "2.2K" 0402 1835,500 r270 top
R117 "100K" 0402 1925,500 r90 top
R118 "0" 0402 1770,500 r90 bottom
R119 "0(DNP)" 0402 1745,500 r90 top
R120 "10K" 0402 2060,370 r270 top
R121 "20" 0402 1970,370 r90 top
R122 "20" 0402 2105,370 r90 top
R123 "10K" 0402 2195,370 r270 top
R124 "0(DNP)" 0603 2410,365 r90 bottom
R125 "0(DNP)" 0603 2515,365 r270 top
R126 "22" 0402 2275,975 r270 top
R127 "0" 0402 2320,975 r270 top
R128 "0" 0402 2365,975 r270 top
R129 "0" 0402 2410,975 r270 top
R130 "22" 0402 2125,720 r0 top
R131 "10K" 0402 2925.2,370.33 r270 top
R132 "20" 0402 2970,370 r90 top
R133 "10K" 0402 3060,370 r270 top
R134 "20" 0402 2835,370 r90 top
R135 "0(DNP)" 0603 3305,365 r90 bottom
R136 "0(DNP)" 0603 3410,365 r270 top
R137 "22" 0402 3080,975 r270 top (schematic designator R126)
R138 "0" 0402 3125,975 r270 top (schematic designator R127)
R139 "0" 0402 3170,975 r270 top (schematic designator R128)
R140 "0" 0402 3215,975 r270 top (schematic designator R129)
R141 "22" 0402 2945,720 r0 top (schematic designator R130)
R142 "4.7K" 0402 4435,3265 r0 bottom
R143 "0(DNP)" 0402 4435,3310 r0 bottom
R144 "0" 0603 4415.83,3368.39 r90 bottom
R145 "10K(DNP)" 0402 5735,1625 r180 top
R146 "0" 0402 5735,1670 r180 top
R147 "510K" 0402 5630,1865 r90 top
R148 "100K" 0402 5585,1865 r90 top
R149 "30K" 0402 5495,1865 r90 top
R150 "30K" 0402 5540,1865 r90 top
R151 "0" 0402 5450,1865 r90 top
R152 "680/1%" 0402 5335,1470 r90 top
R153 "47K" 0402 3830,845 r180 top
R154 "47K" 0402 3685,1045 r180 top
R155 "100K(DNP)" 0402 4070,490 r90 top
R156 "100K(DNP)" 0402 3575,685 r270 top
R157 "4.7K" 0402 3660,530 r270 top
R158 "10K" 0402 1355,1320 r90 bottom
R159 "61.9K/1%" 0402 1410,1145 r90 bottom
R160 "10K" 0402 1310,1320 r90 bottom
R161 "0" 0402 540,350.13 r90 bottom
R162 "0(DNP)" 0402 585,350.13 r90 bottom
R163 "0(DNP)" 0402 630,350.13 r270 bottom
R164 "0" 0402 675,350.13 r270 bottom
R165 "0" 0402 745.13,310 r180 bottom
R166 "270" 0402 132.01,377.76 r90 top
R167 "0(DNP)" 0402 745.13,265 r180 bottom
R168 "0" 0402 925,625 r270 bottom
R169 "0" 0402 970,625 r270 bottom
R170 "10K" 0402 1125,4335 r270 top
R171 "0(DNP)" 0402 1085,4175 r180 top
R172 "61.9K/1%" 0402 1225,4525 r270 top
R173 "0(DNP)" 0402 1085,4220 r180 top
R174 "0" 0402 350,4320 r270 top
R175 "0(DNP)" 0402 330,4420 r180 top
R176 "10(DNP)" 0402 305,4320 r270 top
R177 "10K" 0402 1080,4335 r270 top
R178 "10K" 0402 4685,1050 r90 top
R179 "61.9K/1%" 0402 4635,885 r90 top
R180 "10K" 0402 4730,1050 r90 top
R181 "10K" 0402 1145,4805 r90 bottom
R182 "60" 0402 7140,3450 r270 top
R183 "0(DNP)" 0402 6970,3305 r0 top
R184 "60" 0402 7140,3310 r270 top
R185 "0(DNP)" 0402 6970,3460 r0 top
R186 "0" 0402 6970,3505 r180 top
R187 "10K" 0402 2183.17,2719.61 r0 top
R188 "10K(DNP)" 0402 2182.91,2676.3 r0 top
R189 "10K" 0402 2183.17,2632.99 r0 top
R190 "10K(DNP)" 0402 2183.17,2589.69 r0 top
S1 "PB1" SW-PB-SMD 155,2035 r270 top
S2 "PB2" SW-PB-SMD 155,1427.5 r270 top
S3 "PB3" SW-PB-SMD 155,820 r270 top
U1 "NC7SP126P5X" SC70 6255.91,795.28 r0 top
U2 "TLP127" TLP127 6251.97,574.8 r0 top
U3 "LT3680EMSE" MSOP10 6972.44,2090.55 r0 top (schematic designator U7)
U4 "NC7SP125P5X" SC70 6015.75,559.06 r0 top
U5 "74HC1G04" SOT753 5968.5,377.95 r90 top
U6 "LT3680EMSE" MSOP10 6972.44,811.02 r0 top (schematic designator U7)
U7 "LT3680EMSE" MSOP10 6972.44,1452.76 r0 top
U8 "LT3680EMSE" MSOP10 6972.44,2728.35 r0 top (schematic designator U7)
U9 "LM1117MPX-1.8" AMS1117 1910,1605 r0 top
U10 "NC7SP08P5X" SC70 5315,2320 r180 top
U11 "AR8031" QFN48 6226.34,3985.2 r0 top
U12 "TPS27081ADDC" SOT23-6 4780,4915 r270 top
U13 "TPS61085DGK" MSOP 4485,4705 r90 top
U14 "STM6315RBW13F" SOT143-4 4790,4660 r0 top
U15 "LM7321MF" SOT23-5 3820,4560 r270 top
U16 "TPS61165DBVR" SOT23-6 3105,4425 r90 top
U17 "ADV7180BCPZ" LFCSP40 950,3475 r90 top
U18 "NC7SP08P5X" SC70 750,3715 r270 top
U19 "ADV7180BCPZ" LFCSP40 950,2735 r90 top
U20 "NC7SP08P5X" SC70 750,2970 r270 top
U21 "MAX9814ETD" TDFN14 1830,720 r270 top
U22 "WM8962ECS" BGA49 2400,845 r270 top
U23 "NC7WZ17P6X" SC70-6 2825,1135 r90 top
U24 "WM8962" BGA49 3215,845 r270 top (schematic designator U22)
U25 "MIC2026-1YM" SO8 5401.57,1019.68 r0 bottom
U26 "GL850G-HONXX" QFN28 5500,1645 r0 top
U27 "MIC2026-1YM" SO8 3765,690 r270 top
U28 "TPS27081ADDC" SOT23-6 1350,1110 r180 bottom
U29 "TPS27081ADDC" SOT23-6 1160,4545 r180 top
U30 "N303" NEO-6 465,4680 r180 top
U31 "WIFI 8188" WIFI8188 4395,725 r270 top
U32 "TPS27081ADDC" SOT23-6 4700,825 r0 top
U33 "NC7SP125P5X" SC70 1205,4775 r90 bottom
U34 "TJA1040T" SO8 6725,3380 r270 top
U35 "NLSV1T34DFT2G" SC70 6375,3330 r0 top
U36 "MAX3232" SO-16 5500,4605 r180 top
Y1 "25MHZ" XTAL4_SX_3225 6330,3760 r0 top
Y2 "28.63636MHZ" XTAL4_SX_3225 1425,3400 r90 top
Y3 "28.63636MHZ" XTAL4_SX_3225 1425,2655 r90 top
Y4 "12MHZ" XTAL4_SX_3225 5495,1380 r180 top

## Footprints (in the part's own frame and the unit in brackets; to place one, negate y for a bottom-side part, rotate by r counter-clockwise, add the part's x,y. Pads: shape width x height; smd on the part's side, far side on the other; paste and mask are expansions set on the pad)
1N5819 [mm]
  rect 1x1 smd: 1(2.7,0) 2(0,0)
  silkscreen extent -1.1,-0.7 3.45,0.7
0402 [mil] "Chip Capacitor, Body 1.0x0.5mm, IPC High Density"
  rect 24x21 smd: 1(20.13,0) 2(-19.87,0)
  silkscreen extent -39,-18 39,18
0603 [mm]
  rect 1x0.9 smd: 1(0,0.8) 2(0,-0.8)
  silkscreen extent -0.8,-1.5 0.8,1.5
0805 [mm]
  rect 1.2x1.3 smd: 1(0,0) 2(1.8,0)
  silkscreen extent -0.8,-0.9 2.6,0.9
3030WV-F-2*2P [mm]
  round 2 hole 1.1: 1(1.5,-1.5) 2(-1.5,-1.5) 3(1.5,1.5) 4(-1.5,1.5)
  Keep-Out Layer circle w0.2: c-4.5,2.44 r0.4
  Keep-Out Layer circle w0.2: c4.5,2.44 r0.4
  silkscreen extent -5,-3.7 5,4.5
3528 [mil]
  rect 75x90 smd: 1(67.5,0) 2(-67.5,0)
  silkscreen extent -118,-59 118,59
7343 [mm]
  rect 4x2.5 smd: 1(0,3.3) 2(0,-3.3)
  silkscreen extent -2.2,-4.8 2.2,4.8
AMS1117 [mm]
  rect 1x1.5 smd: 1(-2.3,0) 2(0,0) 3(2.3,0)
  rect 3.3x1.5 smd: 4(0,6.3)
  silkscreen extent -3.3,1 3.3,5.3
ANT [mm]
  rect 1x1 smd: 1(0,-1.5)
  rect 1x2.2 smd: 2(1.5,0) 3(-1.5,0)
  silkscreen extent -1.5,-1.5 1.5,1.5
BGA49 [mil] "BGA49_0P5_3P62X4"
  round 10 smd: A1(0,0) A2(19.69,0) A3(39.37,0) A4(59.06,0) A5(78.75,0) A6(98.43,0) A7(118.12,0) B1(0,-19.69) B2(19.69,-19.69) B3(39.37,-19.69) B4(59.06,-19.69) B5(78.75,-19.69) B6(98.43,-19.69) B7(118.12,-19.69) C1(0,-39.37) C2(19.69,-39.37) C3(39.37,-39.37) C4(59.06,-39.37) C5(78.75,-39.37) C6(98.43,-39.37) C7(118.12,-39.37) D1(0,-59.06) D2(19.69,-59.06) D3(39.37,-59.06) D4(59.06,-59.06) D5(78.75,-59.06) D6(98.43,-59.06) D7(118.12,-59.06) E1(0,-78.75) E2(19.69,-78.75) E3(39.37,-78.75) E4(59.06,-78.75) E5(78.75,-78.75) E6(98.43,-78.75) E7(118.12,-78.75) F1(0,-98.43) F2(19.69,-98.43) F3(39.37,-98.43) F4(59.06,-98.43) F5(78.75,-98.43) F6(98.43,-98.43) F7(118.12,-98.43) G1(0,-118.12) G2(19.69,-118.12) G3(39.37,-118.12) G4(59.06,-118.12) G5(78.75,-118.12) G6(98.43,-118.12) G7(118.12,-118.12)
  silkscreen extent -48,-145 137,27
CON-2PIN [mm]
  rect 1.9x1.9 hole 1: 1(0,0)
  round 1.9 hole 1: 2(-2.54,0)
  silkscreen extent -5.58,-2.6 2.99,3.99
CON-5PIN [mm]
  rect 1.9x1.9 hole 1: 1(0,0)
  round 1.9 hole 1: 2(2.54,0) 3(5.08,0) 4(7.62,0) 5(10.16,0)
  silkscreen extent -3,-4 13.16,2.51
CON-6PIN [mm]
  rect 1.9x1.9 hole 1: 1(0,0)
  round 1.9 hole 1: 2(2.54,0) 3(5.08,0) 4(7.62,0) 5(10.16,0) 6(12.7,0)
  silkscreen extent -3,-4 15.7,2.51
CON-7PIN [mm]
  rect 1.9x1.9 hole 1: 1(0,0)
  round 1.9 hole 1: 2(2.54,0) 3(5.08,0) 4(7.62,0) 5(10.16,0) 6(12.7,0) 7(15.24,0)
  silkscreen extent -3,-4 18.3,2.51
CON-9PIN [mm]
  rect 1.9x1.9 hole 1: 1(-20.32,0)
  round 1.9 hole 1: 2(-17.78,0) 3(-15.24,0) 4(-12.7,0) 5(-10.16,0) 6(-7.62,0) 7(-5.08,0) 8(-2.54,0) 9(0,0)
  silkscreen extent -23.32,-4 3,2.51
CONN-3P [mm]
  rect 1.9x1.9 hole 1: 1(0,0)
  round 1.9 hole 1: 2(2.54,0) 3(5.08,0)
  silkscreen extent -3,-4 8,2.51
cr1220 [mm]
  rect 5x2.2 smd: 1(7.8,0) 2(-7.35,0)
  Keep-Out Layer circle w0.1: c-3.5,0 r0.5
  Keep-Out Layer circle w0.1: c3.75,0 r0.6
  silkscreen extent -7.32,-7.5 7.8,7.53
DL-5X5.4 [mm]
  rect 1.6x3 smd: 1(0,2.2) 2(0,-2.2)
  silkscreen extent -2.5,-2.5 2.5,2.5
FPC0.5-DR-SMD-XP-F(6P) [mm]
  rect 0.25x1.3 smd: 1(-1.25,1.54) 2(-0.75,1.54) 3(-0.25,1.54) 4(0.25,1.54) 5(0.75,1.54) 6(1.25,1.54)
  rect 1.6x2.8 smd: ""(-3.25,-1.54) ""(3.25,-1.54)
  silkscreen extent -4.3,-3.2 4.3,2.5
FPC0.5-DR-SMD-XP-F(40P) [mm]
  rect 0.25x1.3 smd: 1(9.75,1.54) 2(9.25,1.54) 3(8.75,1.54) 4(8.25,1.54) 5(7.75,1.54) 6(7.25,1.54) 7(6.75,1.54) 8(6.25,1.54) 9(5.75,1.54) 10(5.25,1.54) 11(4.75,1.54) 12(4.25,1.54) 13(3.75,1.54) 14(3.25,1.54) 15(2.75,1.54) 16(2.25,1.54) 17(1.75,1.54) 18(1.25,1.54) 19(0.75,1.54) 20(0.25,1.54) 21(-0.25,1.54) 22(-0.75,1.54) 23(-1.25,1.54) 24(-1.75,1.54) 25(-2.25,1.54) 26(-2.75,1.54) 27(-3.25,1.54) 28(-3.75,1.54) 29(-4.25,1.54) 30(-4.75,1.54) 31(-5.25,1.54) 32(-5.75,1.54) 33(-6.25,1.54) 34(-6.75,1.54) 35(-7.25,1.54) 36(-7.75,1.54) 37(-8.25,1.54) 38(-8.75,1.54) 39(-9.25,1.54) 40(-9.75,1.54)
  rect 1.6x2.8 smd: ""(-11.75,-1.54) ""(11.75,-1.54)
  silkscreen extent -12.8,-3.2 12.8,2.5
HDR1X2 [mm] "Connector; Header; 2 Position"
  rect 1.5x1.5 hole 0.9: 1(0,0)
  round 1.5 hole 0.9: 2(2.54,0)
  silkscreen extent -1.27,-1.27 3.81,1.27
HDR1X3 [mm] "Connector; Header; 3 Position"
  rect 1.5x1.5 hole 0.9: 1(0,0)
  round 1.5 hole 0.9: 2(2.54,0) 3(5.08,0)
  silkscreen extent -1.27,-1.27 6.35,1.27
HDR2X5 [mm] "Connector; Header; 5x2 Position"
  rect 1.5x1.5 hole 0.9: 1(0,0)
  round 1.5 hole 0.9: 2(0,2.54) 3(2.54,0) 4(2.54,2.54) 5(5.08,0) 6(5.08,2.54) 7(7.62,0) 8(7.62,2.54) 9(10.16,0) 10(10.16,2.54)
  silkscreen extent -1.27,-1.27 11.43,3.81
IMX6-CPU-BOARD [mm]
  rect 1.6x0.3 smd: A1(2.6,49.5) A2(6,49.5) A3(2.6,49) A4(6,49) A5(2.6,48.5) A6(6,48.5) A7(2.6,48) A8(6,48) A9(2.6,47.5) A10(6,47.5) A11(2.6,47) A12(6,47) A13(2.6,46.5) A14(6,46.5) A15(2.6,46) A16(6,46) A17(2.6,45.5) A18(6,45.5) A19(2.6,45) A20(6,45) A21(2.6,44.5) A22(6,44.5) A23(2.6,44) A24(6,44) A25(2.6,43.5) A26(6,43.5) A27(2.6,43) A28(6,43) A29(2.6,42.5) A30(6,42.5) A31(2.6,42) A32(6,42) A33(2.6,41.5) A34(6,41.5) A35(2.6,41) A36(6,41) A37(2.6,40.5) A38(6,40.5) A39(2.6,40) A40(6,40) A41(2.6,39.5) A42(6,39.5) A43(2.6,39) A44(6,39) A45(2.6,38.5) A46(6,38.5) A47(2.6,38) A48(6,38) A49(2.6,37.5) A50(6,37.5) A51(2.6,37) A52(6,37) A53(2.6,36.5) A54(6,36.5) A55(2.6,36) A56(6,36) A57(2.6,35.5) A58(6,35.5) A59(2.6,35) A60(6,35) B1(2.6,25) B2(6,25) B3(2.6,24.5) B4(6,24.5) B5(2.6,24) B6(6,24) B7(2.6,23.5) B8(6,23.5) B9(2.6,23) B10(6,23) B11(2.6,22.5) B12(6,22.5) B13(2.6,22) B14(6,22) B15(2.6,21.5) B16(6,21.5) B17(2.6,21) B18(6,21) B19(2.6,20.5) B20(6,20.5) B21(2.6,20) B22(6,20) B23(2.6,19.5) B24(6,19.5) B25(2.6,19) B26(6,19) B27(2.6,18.5) B28(6,18.5) B29(2.6,18) B30(6,18) B31(2.6,17.5) B32(6,17.5) B33(2.6,17) B34(6,17) B35(2.6,16.5) B36(6,16.5) B37(2.6,16) B38(6,16) B39(2.6,15.5) B40(6,15.5) B41(2.6,15) B42(6,15) B43(2.6,14.5) B44(6,14.5) B45(2.6,14) B46(6,14) B47(2.6,13.5) B48(6,13.5) B49(2.6,13) B50(6,13) B51(2.6,12.5) B52(6,12.5) B53(2.6,12) B54(6,12) B55(2.6,11.5) B56(6,11.5) B57(2.6,11) B58(6,11) B59(2.6,10.5) B60(6,10.5) C1(60,52.5) C2(63.4,52.5) C3(60,52) C4(63.4,52) C5(60,51.5) C6(63.4,51.5) C7(60,51) C8(63.4,51) C9(60,50.5) C10(63.4,50.5) C11(60,50) C12(63.4,50) C13(60,49.5) C14(63.4,49.5) C15(60,49) C16(63.4,49) C17(60,48.5) C18(63.4,48.5) C19(60,48) C20(63.4,48) C21(60,47.5) C22(63.4,47.5) C23(60,47) C24(63.4,47) C25(60,46.5) C26(63.4,46.5) C27(60,46) C28(63.4,46) C29(60,45.5) C30(63.4,45.5) C31(60,45) C32(63.4,45) C33(60,44.5) C34(63.4,44.5) C35(60,44) C36(63.4,44) C37(60,43.5) C38(63.4,43.5) C39(60,43) C40(63.4,43) C41(60,42.5) C42(63.4,42.5) C43(60,42) C44(63.4,42) C45(60,41.5) C46(63.4,41.5) C47(60,41) C48(63.4,41) C49(60,40.5) C50(63.4,40.5) C51(60,40) C52(63.4,40) C53(60,39.5) C54(63.4,39.5) C55(60,39) C56(63.4,39) C57(60,38.5) C58(63.4,38.5) C59(60,38) C60(63.4,38) D1(60,22) D2(63.4,22) D3(60,21.5) D4(63.4,21.5) D5(60,21) D6(63.4,21) D7(60,20.5) D8(63.4,20.5) D9(60,20) D10(63.4,20) D11(60,19.5) D12(63.4,19.5) D13(60,19) D14(63.4,19) D15(60,18.5) D16(63.4,18.5) D17(60,18) D18(63.4,18) D19(60,17.5) D20(63.4,17.5) D21(60,17) D22(63.4,17) D23(60,16.5) D24(63.4,16.5) D25(60,16) D26(63.4,16) D27(60,15.5) D28(63.4,15.5) D29(60,15) D30(63.4,15) D31(60,14.5) D32(63.4,14.5) D33(60,14) D34(63.4,14) D35(60,13.5) D36(63.4,13.5) D37(60,13) D38(63.4,13) D39(60,12.5) D40(63.4,12.5) D41(60,12) D42(63.4,12) D43(60,11.5) D44(63.4,11.5) D45(60,11) D46(63.4,11) D47(60,10.5) D48(63.4,10.5) D49(60,10) D50(63.4,10) D51(60,9.5) D52(63.4,9.5) D53(60,9) D54(63.4,9) D55(60,8.5) D56(63.4,8.5) D57(60,8) D58(63.4,8) D59(60,7.5) D60(63.4,7.5)
  round 3 hole 2: MT5(3,57) MT6(3,3) MT7(63,57) MT8(63,3)
  Keep-Out Layer circle w0.15: c2.8,33.95 r0.3
  Keep-Out Layer circle w0.15: c2.8,50.55 r0.3
  Keep-Out Layer circle w0.15: c2.8,9.45 r0.3
  Keep-Out Layer circle w0.15: c2.8,26.05 r0.3
  Keep-Out Layer circle w0.15: c60.2,36.95 r0.3
  Keep-Out Layer circle w0.15: c60.2,53.55 r0.3
  Keep-Out Layer circle w0.15: c60.2,6.45 r0.3
  Keep-Out Layer circle w0.15: c60.2,23.05 r0.3
  silkscreen extent 0,0 66,60
IND-4.7UH-1A [mil]
  rect 119x40 smd: 1(0,0) 2(0,78.74)
  silkscreen extent -68,-29 68,107
IND-4.7UH-4A [mm]
  rect 2.2x1.6 smd: 1(0,-3.3) 2(0,3.3)
  silkscreen extent -3.2,-3.2 3.2,3.2
IND-10UH [mm]
  rect 1.8x5 smd: 1(-1.65,0) 2(1.65,0)
  silkscreen extent -2.85,-2.8 2.85,2.8
LED0603 [mm]
  rect 1x0.9 smd: 1(0,0) 2(0,-1.6)
  silkscreen extent -0.7,-2.5 0.7,0.6
LFCSP40 [mm]
  rect 0.6x0.3 smd: 1(0,0) 2(0,-0.5) 3(0,-1) 4(0,-1.5) 5(0,-2) 6(0,-2.5) 7(0,-3) 8(0,-3.5) 9(0,-4) 10(0,-4.5) 21(6,-4.5) 22(6,-4) 23(6,-3.5) 24(6,-3) 25(6,-2.5) 26(6,-2) 27(6,-1.5) 28(6,-1) 29(6,-0.5) 30(6,0)
  rect 0.3x0.6 smd: 11(0.75,-5.25) 12(1.25,-5.25) 13(1.75,-5.25) 14(2.25,-5.25) 15(2.75,-5.25) 16(3.25,-5.25) 17(3.75,-5.25) 18(4.25,-5.25) 19(4.75,-5.25) 20(5.25,-5.25) 31(5.25,0.75) 32(4.75,0.75) 33(4.25,0.75) 34(3.75,0.75) 35(3.25,0.75) 36(2.75,0.75) 37(2.25,0.75) 38(1.75,0.75) 39(1.25,0.75) 40(0.75,0.75)
  rect 4.25x4.25 smd: ""(3,-2.25)
  silkscreen extent -1.02,-5.25 6,0.75
MARK [mm]
  round 1 smd paste-0.5 mask+0.6: ""(0,0)
  Keep-Out Layer circle w0.2: c0,0 r1.2
MINI-PCIE [mm]
  rect 2.3x3.2 smd: 0(-2.15,-3.5) 0(27.1,-3.5)
  rect 0.6x2 smd: 1(0.7,-4.1) 2(1.1,4.1) 3(1.5,-4.1) 4(1.9,4.1) 5(2.3,-4.1) 6(2.7,4.1) 7(3.1,-4.1) 8(3.5,4.1) 9(3.9,-4.1) 10(4.3,4.1) 11(4.7,-4.1) 12(5.1,4.1) 13(5.5,-4.1) 14(5.9,4.1) 15(6.3,-4.1) 16(6.7,4.1) 17(10.3,-4.1) 18(10.7,4.1) 19(11.1,-4.1) 20(11.5,4.1) 21(11.9,-4.1) 22(12.3,4.1) 23(12.7,-4.1) 24(13.1,4.1) 25(13.5,-4.1) 26(13.9,4.1) 27(14.3,-4.1) 28(14.7,4.1) 29(15.1,-4.1) 30(15.5,4.1) 31(15.9,-4.1) 32(16.3,4.1) 33(16.7,-4.1) 34(17.1,4.1) 35(17.5,-4.1) 36(17.9,4.1) 37(18.3,-4.1) 38(18.7,4.1) 39(19.1,-4.1) 40(19.5,4.1) 41(19.9,-4.1) 42(20.3,4.1) 43(20.7,-4.1) 44(21.1,4.1) 45(21.5,-4.1) 46(21.9,4.1) 47(22.3,-4.1) 48(22.7,4.1) 49(23.1,-4.1) 50(23.5,4.1) 51(23.9,-4.1) 52(24.3,4.1)
  rect 5x5 hole 2.5: MT9(0.4,48.05) MT10(24.6,48.05)
  Keep-Out Layer circle w0.1: c0,0 r0.8
  Keep-Out Layer circle w0.1: c25,0 r0.55
  silkscreen extent -2.5,-7.3 27.5,51
MINIUSB [mm]
  rect 0.5x2.3 smd: 1(1.6,0) 2(0.8,0) 3(0,0) 4(-0.8,0) 5(-1.6,0)
  rect 2x2.5 smd: 6(-4.4,0.1) 7(-4.4,5.6) 8(4.4,5.6) 9(4.4,0.1)
  Keep-Out Layer circle w0.1: c2.2,2.6 r0.45
  Keep-Out Layer circle w0.1: c-2.2,2.6 r0.45
  silkscreen extent -5.6,-1.35 5.6,7.85
MOSFET [mil]
  rect 36x36 smd: 1(0,0) 2(75,0)
  rect 36x50 smd: 3(38,80)
  silkscreen extent -20,-5 95,85
MSOP [mm]
  rect 0.45x1.45 smd: 1(0,0) 2(0.65,0) 3(1.3,0) 4(1.95,0) 5(1.95,4.4) 6(1.3,4.4) 7(0.65,4.4) 8(0,4.4)
  silkscreen extent -0.53,1 2.47,3.4
MSOP10 [mil]
  rect 35x12 smd: 1(0,0) 2(0,-19.68) 3(0,-39.37) 4(0,-59.06) 5(0,-78.74) 6(170.9,-78.74) 7(170.9,-59.06) 8(170.9,-39.37) 9(170.9,-19.68) 10(170.9,0)
  rect 86x114 smd: 11(85.45,-39.37)
  silkscreen extent -48,-107 154,29
NEO-6 [mm]
  rect 1.8x0.8 smd: 1(0,0) 2(0,1.1) 3(0,2.2) 4(0,3.3) 5(0,4.4) 6(0,5.5) 7(0,6.6) 8(-0.1,9.6) 9(-0.1,10.7) 10(-0.1,11.8) 11(-0.1,12.9) 12(-0.1,14) 13(-12.3,14) 14(-12.3,12.9) 15(-12.3,11.8) 16(-12.3,10.7) 17(-12.3,9.6) 18(-12.4,6.6) 19(-12.4,5.5) 20(-12.4,4.4) 21(-12.4,3.3) 22(-12.4,2.2) 23(-12.4,1.1) 24(-12.4,0)
  silkscreen extent -12.4,-1 0,15
NPN [mil]
  rect 36x50 smd: 1(38,80)
  rect 36x36 smd: 2(0,0) 3(75,0)
  silkscreen extent -20,-5 95,85
QFN28 [mil] "GSL_QFN28"
  rrect0% 31.5x9.84 smd: 1(-84.52,59.06) 2(-84.52,39.37) 3(-84.52,19.69) 4(-84.52,0) 5(-84.52,-19.69) 6(-84.52,-39.37) 7(-84.52,-59.06) 15(112.34,-59.06) 16(112.34,-39.37) 17(112.34,-19.69) 18(112.34,0) 19(112.34,19.69) 20(112.34,39.37) 21(112.34,59.06)
  rrect0% 9.84x31.5 smd: 8(-45.15,-98.43) 9(-25.46,-98.43) 10(-5.78,-98.43) 11(13.91,-98.43) 12(33.6,-98.43) 13(53.28,-98.43) 14(72.97,-98.43) 22(72.97,98.43) 23(53.28,98.43) 24(33.6,98.43) 25(13.91,98.43) 26(-5.78,98.43) 27(-25.46,98.43) 28(-45.15,98.43)
  rect 133.86x133.86 smd: 29(13.91,0)
  silkscreen extent -131,-99 114,99
QFN48 [mil]
  rrect0% 8x38 smd: 1(0,0) 2(15.74,0) 3(31.49,0) 4(47.24,0) 5(62.99,0) 6(78.74,0) 7(94.48,0) 8(110.23,0) 9(125.98,0) 10(141.73,0) 11(157.48,0) 12(173.22,0) 25(173.22,239.18) 26(157.48,239.18) 27(141.73,239.18) 28(125.98,239.18) 29(110.23,239.18) 30(94.48,239.18) 31(78.74,239.18) 32(62.99,239.18) 33(47.24,239.18) 34(31.49,239.18) 35(15.74,239.18) 36(0,239.18)
  rrect0% 38x8 smd: 13(206.2,32.98) 14(206.2,48.72) 15(206.2,64.47) 16(206.2,80.22) 17(206.2,95.97) 18(206.2,111.72) 19(206.2,127.46) 20(206.2,143.21) 21(206.2,158.96) 22(206.2,174.71) 23(206.2,190.46) 24(206.2,206.2) 37(-32.98,206.2) 38(-32.98,190.46) 39(-32.98,174.71) 40(-32.98,158.96) 41(-32.98,143.21) 42(-32.98,127.46) 43(-32.98,111.72) 44(-32.98,95.97) 45(-32.98,80.22) 46(-32.98,64.47) 47(-32.98,48.72) 48(-32.98,32.98)
  rect 150x150 smd: 49(86.61,119.59)
  silkscreen extent -39,-51 212,245
SC70 [mil]
  rect 16x32 smd: 1(0,0) 2(25.6,0) 3(51.2,0) 4(51.2,85) 5(0,85)
  silkscreen extent -25,9 76,76
SC70-6 [mil] "SC70_6LEAD"
  rect 20x16 smd: 1(0,0) 2(0,25.6) 3(0,51.2) 4(-74.82,51.2) 5(-74.82,25.6) 6(-74.82,0)
  silkscreen extent -72,-26 40,77
SI-61001 [mil] "SI-61001"
  rect 60x60 hole 39.37: 1(-225,349.91)
  round 60 hole 39.37: 2(-175,249.91) 3(-125,349.91) 4(-75,249.91) 5(-25,349.91) 6(25,249.91) 7(75,349.91) 8(125,249.91) 9(175,349.91) 10(225,249.91)
  round 65 hole 40: 11(-260.83,-159.93) 12(-160,-160.09) 13(160.83,-159.93) 14(261,-160.09)
  round 84 hole 63: SH1(-304.92,119.99) SH2(304.92,119.99)
  Keep-Out Layer circle w10: c-225,-0.09 r63.98
  Keep-Out Layer circle w10: c225,-0.09 r63.98
  silkscreen extent -318,-425 318,425
SIMLOCK [mm]
  rect 1.7x1.3 smd: 1(0,-3.9) 2(0,-1.36) 3(0,1.18) 4(25.7,-3.9) 5(25.7,-1.36) 6(25.7,1.18)
  silkscreen extent -1.53,-8.61 29.25,8.6
SMC [mil]
  rect 99x130 smd: 1(0,0) 2(-267.72,0)
  silkscreen extent -280,-129 12,129
SO8 [mm] "Small Outline; 8 Leads; Body Width 3.9 mm; Pitch 1.27 mm"
  rect 0.6x2.2 smd: 1(-1.905,-2.6) 2(-0.635,-2.6) 3(0.635,-2.6) 4(1.905,-2.6) 5(1.905,2.6) 6(0.635,2.6) 7(-0.635,2.6) 8(-1.905,2.6)
  silkscreen extent -2.88,-2.72 2.5,1.1
SO-16 [mil] "Small Outline; 16 Leads; Body Width 5.6 mm; Pitch 1.27 mm"
  oval 24x80 smd: 1(0,0) 2(50,0) 3(100,0) 4(150,0) 5(200,0) 6(250,0) 7(300,0) 8(350,0) 9(350,220) 10(300,220) 11(250,220) 12(200,220) 13(150,220) 14(100,220) 15(50,220) 16(0,220)
  silkscreen extent -25,60 375,160
SOD123FL [mm]
  rect 0.9x1.2 smd: 1(0,0) 2(3.3,0)
  silkscreen extent -0.7,-0.9 4,0.9
SOD323F [mm]
  rect 1x1 smd: 1(-1.35,0) 2(1.35,0)
  silkscreen extent -2.5,-0.7 2.1,0.7
SOT23-5 [mm]
  rect 0.5x1 smd: 1(0,0) 2(1,0) 3(2,0) 4(2,3) 5(0,3)
  silkscreen extent -0.7,0.6 2.7,2.4
SOT23-6 [mm]
  rect 0.5x1 smd: 1(0,0) 2(1,0) 3(2,0) 4(2,3) 5(1,3) 6(0,3)
  silkscreen extent -0.7,0.6 2.7,2.4
SOT143-4 [mil]
  rect 40x60 smd: 1(0,0)
  rect 25x60 smd: 2(67,0) 3(67,76) 4(-8,76)
  silkscreen extent -38,-60 96,72
SOT753 [mm]
  rect 1x0.6 smd: 1(0,0)
  oval 1x0.6 smd: 2(0,-0.95) 3(0,-1.9) 4(3,-1.9) 5(3,0)
  silkscreen extent 0,-2.5 3,0.6
SOT-23 [mil]
  rect 36x36 smd: 1(0,0) 2(75,0)
  rect 36x50 smd: 3(38,80)
  silkscreen extent -20,-5 95,85
SW-PB-SMD [mm]
  rect 2x1.4 smd: 1(-4.5,2.25) 1(4.5,2.25) 2(-4.5,-2.25) 2(4.5,-2.25)
  silkscreen extent -3,-3 3,3
TDFN14 [mil]
  rect 26x8 smd: 1(0,0) 2(0,-15.74) 3(0,-31.49) 4(0,-47.24) 5(0,-62.99) 6(0,-78.74) 7(0,-94.48) 8(120.08,-94.48) 9(120.08,-78.74) 10(120.08,-62.99) 11(120.08,-47.24) 12(120.08,-31.49) 13(120.08,-15.74) 14(120.08,0)
  rect 71x95 smd: 15(60.04,-47.24)
  silkscreen extent -44,-115 128,21
TLP127 [mm]
  rect 0.8x1.2 smd: 1(-1.27,-3.5) 2(1.27,-3.5) 3(1.27,3.5) 4(-1.27,3.5)
  silkscreen extent -1.8,-2.5 1.8,2.5
USB-HOST-2 [mm]
  round 1.524 hole 1: 1(7,-2.6) 2(4.5,-2.6) 3(2.5,-2.6) 4(0,-2.6) 5(7,0) 6(4.5,0) 7(2.5,0) 8(0,0)
  round 3.5 hole 2.3: 9(10.1,2.7) 10(-3.1,2.7) 11(-3.1,-3) 12(10.1,-3)
  silkscreen extent -3.7,-4 10.7,13
WIFI8188 [mm]
  rect 2.3x1.5 smd: 1(0.6,11.7) 2(0.6,8.9) 3(0.6,5.4) 4(0.6,2.9) 5(11.7,4.2) 6(11.7,2.2)
  silkscreen extent 0,0 12.3,13
XTAL4_SX_3225 [mil]
  rect 51x43 smd: 1(0,0) 2(90.56,0) 3(90.56,74.8) 4(0,74.8)
  silkscreen extent -37,-66 128,109